# EAGLE board SparkFun_MicroMod_Input_and_Display_Carrier-Panel (EAGLE 9.6.2), part 1 of 2
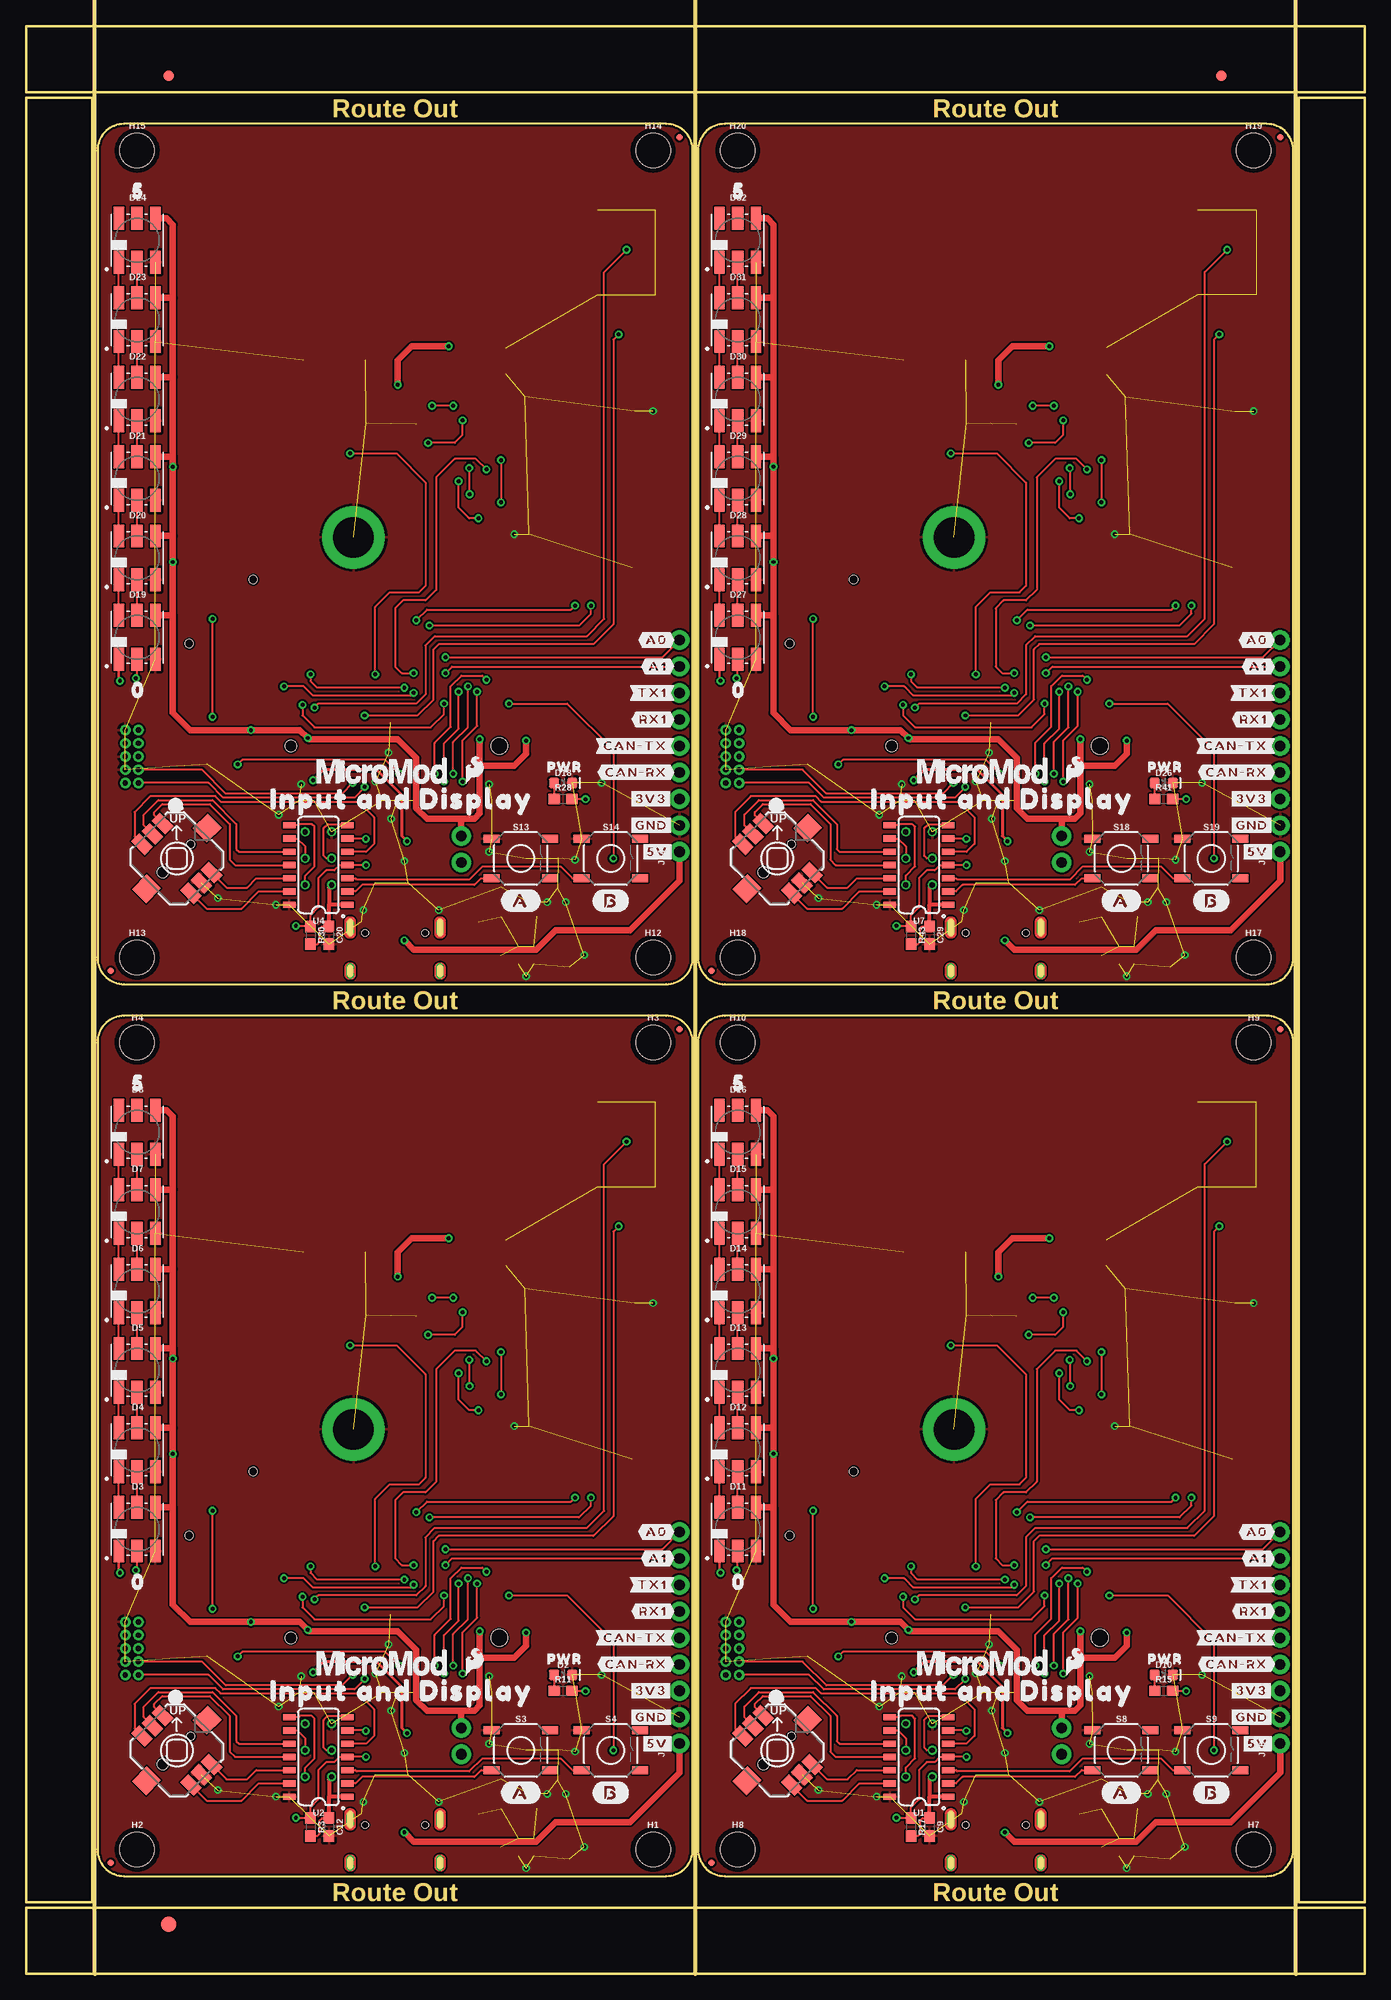
[diagram p0: board, top side]
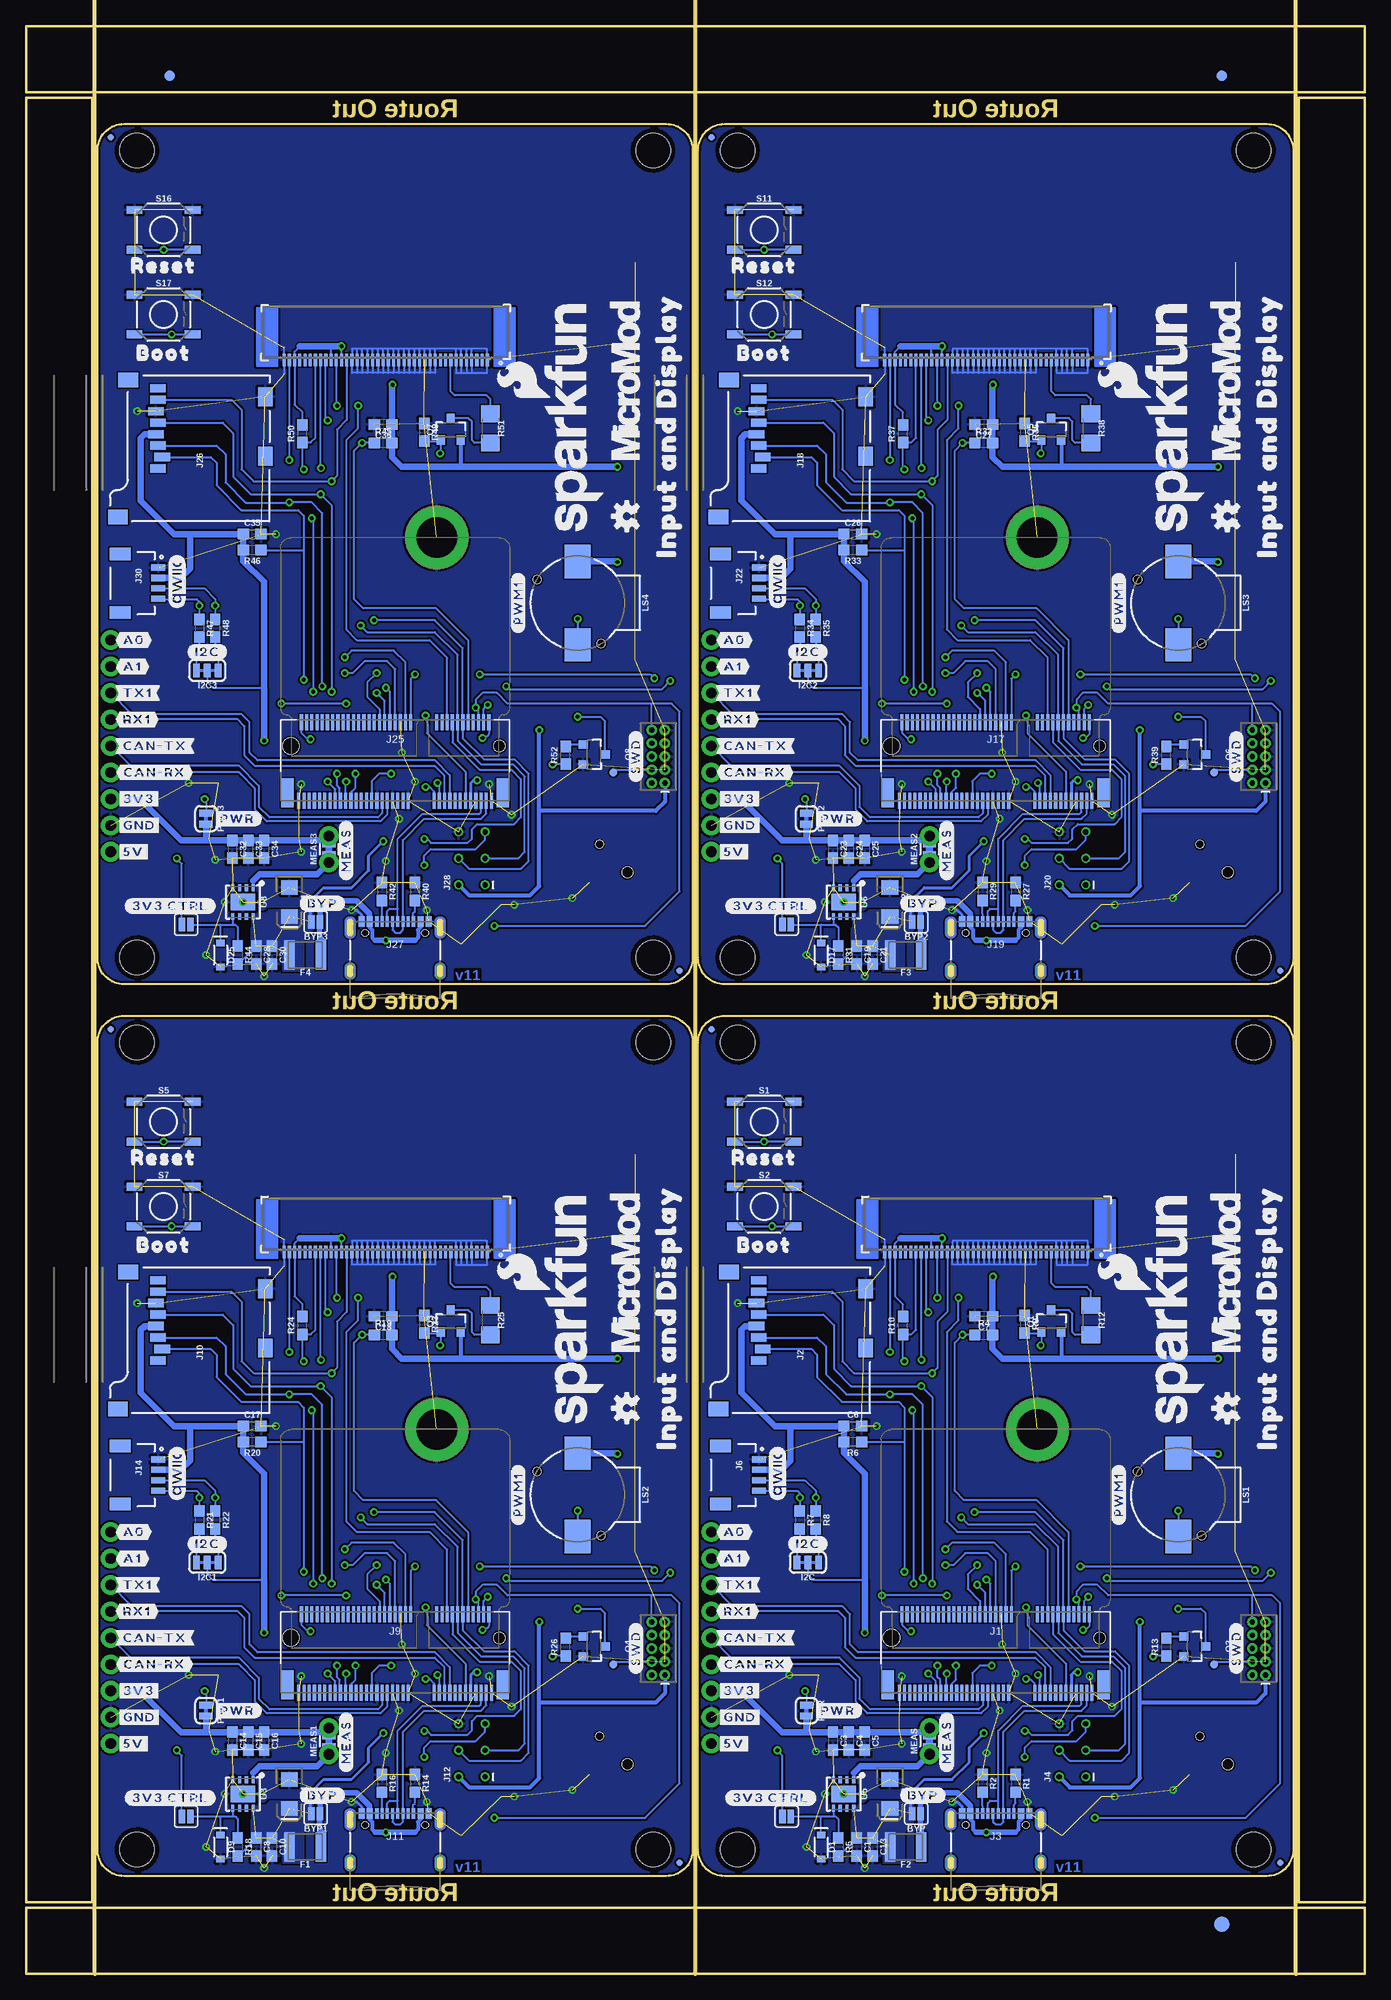
[diagram p1: board, bottom side, seen from below]

Size 128.52 x 186.94 mm. Coordinates in mm from the lower left corner, seen from the top.
Outline: 64.01,11.94 64.01,89.41 arc90 61.47,91.95 9.4,91.95 arc90 6.86,89.41 6.86,11.94 arc90 9.4,9.4 61.47,9.4 arc90 64.01,11.94
Outline: 121.67,11.94 121.67,89.41 arc90 119.13,91.95 67.06,91.95 arc90 64.52,89.41 64.52,11.94 arc90 67.06,9.4 119.13,9.4 arc90 121.67,11.94
Outline: 64.01,97.54 64.01,175.01 arc90 61.47,177.55 9.4,177.55 arc90 6.86,175.01 6.86,97.54 arc90 9.4,95 61.47,95 arc90 64.01,97.54
Outline: 121.67,97.54 121.67,175.01 arc90 119.13,177.55 67.06,177.55 arc90 64.52,175.01 64.52,97.54 arc90 67.06,95 119.13,95 arc90 121.67,97.54
Outline: 0,6.35 128.52,6.35 128.52,0 0,0 0,6.35
Outline: 122.17,180.09 128.52,180.09 128.52,6.86 122.17,6.86 122.17,180.09
Outline: 0,186.94 128.52,186.94 128.52,180.59 0,180.59 0,186.94
Outline: 0,180.09 6.35,180.09 6.35,6.86 0,6.86 0,180.09
Copper layers (1*16): Top 0.035mm / dielectric 1.5mm / Bottom 0.035mm
Design rules "SparkFun_MicroMod_Input_and_Display_Carrier": minimum track width 7mil, minimum drill 15mil, track to track 7mil, track to pad 7mil, pad to pad 7mil, via to via 7mil, smd to smd 7mil, copper to edge 7mil, drill to drill 7mil, minimum pad ring 7mil, minimum via ring 7mil, stop-mask expansion 4mil, vias tented up to drill 25mil, thermal gap 10mil
Milling: 3 lines

## Footprints (pad centres in the part's own frame; a part is rotated, then mirrored left to right if it is on the bottom)
SMT-JUMPER_2_NO_SILK = smd 0.635 x 1.27: 1 -0.406,0; 2 0.406,0
0603 = smd 1.1 x 1: 1 -0.85,0; 2 0.85,0
EIA3216 = smd 1.4 x 1.6: + 1.4,0; - -1.4,0
SOD-323 = smd 0.63 x 0.83: A 1.15,0; C -1.15,0
LED-0603 = smd 1 x 1: A -0.877,0; C 0.877,0
APA102-5050 = smd 1 x 2.2: P1 -1.75,-2.1; P3 1.75,-2.1; P4 1.75,2.1; P6 -1.75,2.1 | smd 1.1 x 2.2: P2 0,-2.1; P5 0,2.1
FIDUCIAL-1X2 = smd 1 x 1: 1 0,0
FIDUCIAL-1.5X3 = smd 1.5 x 1.5: 1 0,0
1210 = smd 1 x 2.8: 1 -1.5,0; 2 1.5,0
FIDUCIAL-MICRO = smd 0.635 x 0.635: 1 0,0
STAND-OFF = hole 3.302: 0,0
STAND-OFF-REFLOW-M2.5 = drill 3.9 pad 6: 1 0,0
SMT-JUMPER_3_2-NC_TRACE_SILK = smd 0.66 x 1.27: 1 -1.041,0; 2 0,0; 3 1.041,0
M.2-CONNECTOR-E = smd 0.3 x 1.55: 1 9.25,-5.275; 2 9,2.275; 3 8.75,-5.275; 4 8.5,2.275; 5 8.25,-5.275; 6 8,2.275; 7 7.75,-5.275; 8 7.5,2.275; 9 7.25,-5.275; 10 7,2.275; 11 6.75,-5.275; 12 6.5,2.275; 13 6.25,-5.275; 14 6,2.275; 15 5.75,-5.275; 16 5.5,2.275; 17 5.25,-5.275; 18 5,2.275; 19 4.75,-5.275; 20 4.5,2.275; 21 4.25,-5.275; 22 4,2.275; 23 3.75,-5.275; 32 1.5,2.275; 33 1.25,-5.275; 34 1,2.275; 35 0.75,-5.275; 36 0.5,2.275; 37 0.25,-5.275; 38 0,2.275; 39 -0.25,-5.275; 40 -0.5,2.275; 41 -0.75,-5.275; 42 -1,2.275; 43 -1.25,-5.275; 44 -1.5,2.275; 45 -1.75,-5.275; 46 -2,2.275; 47 -2.25,-5.275; 48 -2.5,2.275; 49 -2.75,-5.275; 50 -3,2.275; 51 -3.25,-5.275; 52 -3.5,2.275; 53 -3.75,-5.275; 54 -4,2.275; 55 -4.25,-5.275; 56 -4.5,2.275; 57 -4.75,-5.275; 58 -5,2.275; 59 -5.25,-5.275; 60 -5.5,2.275; 61 -5.75,-5.275; 62 -6,2.275; 63 -6.25,-5.275; 64 -6.5,2.275; 65 -6.75,-5.275; 66 -7,2.275; 67 -7.25,-5.275; 68 -7.5,2.275; 69 -7.75,-5.275; 70 -8,2.275; 71 -8.25,-5.275; 72 -8.5,2.275; 73 -8.75,-5.275; 74 -9,2.275; 75 -9.25,-5.275 | smd 1.2 x 2.75: A1 10.35,-4.5; A2 -10.35,-4.5 | hole 1.1: 10,0 | hole 1.6: -10,0
MICRO-SD-SOCKET = smd 1.8 x 1.4: CD1 -2.05,0.4; CD2 -7.75,0.4 | smd 0.8 x 1.5: CS -7.84,10.3; DI -6.74,10.7; DO -2.34,10.7; GND -3.44,10.9; RSV1 -8.94,10.7; RSV2 -1.24,10.7; SCLK -4.54,10.7; VCC -5.64,10.9 | smd 1.4 x 1.9: GND1 -13.6,14.55; GND3 -0.45,13.55
USB-C-16P-2LAYER-PADS = smd 0.3 x 1: A5 -1.25,-0.34; A6 -0.25,-0.34; A7 0.25,-0.34; A8 1.25,-0.34; B5 1.75,-0.34; B6 0.75,-0.34; B7 -0.75,-0.34; B8 -1.75,-0.34 | smd 0.6 x 1: GND -3.225,-0.34; GND2 3.225,-0.34; VBUS1 -2.45,-0.34; VBUS2 2.45,-0.34 | drill 0.4 pad 0.6 long: SHLD1 -4.318,-0.915; SHLD2 4.318,-0.915; SHLD3 -4.318,-5.095; SHLD4 4.318,-5.095 | hole 0.65: -2.89,-1.445; 2.89,-1.445
2X3_TEST_POINTS = drill 0.508: 1 -2.54,-1.27; 2 -2.54,1.27; 3 0,-1.27; 4 0,1.27; 5 2.54,-1.27; 6 2.54,1.27
FPC05040-17204 = smd 0.3 x 1.2: 1 -9.75,0.6; 2 -9.25,0.6; 3 -8.75,0.6; 4 -8.25,0.6; 5 -7.75,0.6; 6 -7.25,0.6; 7 -6.75,0.6; 8 -6.25,0.6; 9 -5.75,0.6; 10 -5.25,0.6; 11 -4.75,0.6; 12 -4.25,0.6; 13 -3.75,0.6; 14 -3.25,0.6; 15 -2.75,0.6; 16 -2.25,0.6; 17 -1.75,0.6; 18 -1.25,0.6; 19 -0.75,0.6; 20 -0.25,0.6; 21 0.25,0.6; 22 0.75,0.6; 23 1.25,0.6; 24 1.75,0.6; 25 2.25,0.6; 26 2.75,0.6; 27 3.25,0.6; 28 3.75,0.6; 29 4.25,0.6; 30 4.75,0.6; 31 5.25,0.6; 32 5.75,0.6; 33 6.25,0.6; 34 6.75,0.6; 35 7.25,0.6; 36 7.75,0.6; 37 8.25,0.6; 38 8.75,0.6; 39 9.25,0.6; 40 9.75,0.6
JST04_1MM_RA = smd 0.6 x 1.35: 1 -1.5,0; 2 -0.5,0; 3 0.5,0; 4 1.5,0 | smd 1.2 x 2: NC1 2.8,-3.675; NC2 -2.8,-3.675
2X5-PTH-1.27MM-NO_SILK = drill 0.508 pad 1: 1 -2.54,-0.635; 2 -2.54,0.635; 3 -1.27,-0.635; 4 -1.27,0.635; 5 0,-0.635; 6 0,0.635; 7 1.27,-0.635; 8 1.27,0.635; 9 2.54,-0.635; 10 2.54,0.635
1X09_NO_SILK = drill 1.016 pad 1.88: 1 0,0; 2 2.54,0; 3 5.08,0; 4 7.62,0; 5 10.16,0; 6 12.7,0; 7 15.24,0; 8 17.78,0; 9 20.32,0
BUZZER-CCV = smd 3.2 x 2.5: + 4,0; - -4,0 | hole 0.8: -3.9,-2.25; 2.25,3.9
COMBO-JUMPER_2_NC_TRACE = smd 0.635 x 1.27: 1 -0.508,0; 2 0.508,0 | drill 1.016 pad 1.88: 3 -1.27,0; 4 1.27,0
SMT-JUMPER_2_NC_TRACE_SILK = smd 0.66 x 1.27: 1 -0.521,0; 2 0.521,0
SOT23-3 = smd 0.8 x 0.9: 1 -0.95,-1; 2 0.95,-1; 3 0,1.1
1206 = smd 1.6 x 1.8: 1 -1.4,0; 2 1.4,0
TACTILE_SWITCH_SMD_5.2MM = smd 1.524 x 0.762: 1 -2.794,1.905; 2 2.794,1.905; 3 -2.794,-1.905; 4 2.794,-1.905
JOYSTICK_MINI = smd 1.85 x 1.1: A -3.325,1.4; B 3.325,1.4; C -3.325,-1.4; CTR -3.325,0; D 3.325,-1.4; GND 3.325,0 | smd 1.9 x 2: NC 0,4.13; NC@0 0,-4.13 | hole 0.75: 0,1.9 | hole 1.05: 0,-1.9
PAD.03X.03 = smd 0.762 x 0.762: P$1 0,0
SO14 = smd 0.6 x 1.2: 1 -3.81,-2.8; 2 -2.54,-2.8; 3 -1.27,-2.8; 4 0,-2.8; 5 1.27,-2.8; 6 2.54,-2.8; 7 3.81,-2.8; 8 3.81,2.8; 9 2.54,2.8; 10 1.27,2.8; 11 0,2.8; 12 -1.27,2.8; 13 -2.54,2.8; 14 -3.81,2.8
UDFN-8 = smd 0.3 x 0.65: 1 -0.975,-1.375; 2 -0.325,-1.375; 3 0.325,-1.375; 4 0.975,-1.375; 5 0.975,1.375; 6 0.325,1.375; 7 -0.325,1.375; 8 -0.975,1.375 | smd 2.35 x 1.6: EP 0,0

## Placement (x,y rotation side)
3V3_EN  [SMT-JUMPER_2_NO_SILK]  55.5,15.11 0 bottom
3V3_EN1  [SMT-JUMPER_2_NO_SILK]  113.16,15.11 0 bottom
3V3_EN2  [SMT-JUMPER_2_NO_SILK]  55.5,100.71 0 bottom
3V3_EN3  [SMT-JUMPER_2_NO_SILK]  113.16,100.71 0 bottom
BYP  JUMPER-SMT_2_NO_SILK  [SMT-JUMPER_2_NO_SILK]  43.05,15.37 180 bottom
BYP1  JUMPER-SMT_2_NO_SILK  [SMT-JUMPER_2_NO_SILK]  100.71,15.37 180 bottom
BYP2  JUMPER-SMT_2_NO_SILK  [SMT-JUMPER_2_NO_SILK]  43.05,100.96 180 bottom
BYP3  JUMPER-SMT_2_NO_SILK  [SMT-JUMPER_2_NO_SILK]  100.71,100.96 180 bottom
C1  0.1uF  [0603]  48.77,12.19 270 bottom
C2  10uF  [EIA3216]  45.59,17.27 270 bottom
C3  1.0uF  [0603]  51.05,22.35 270 bottom
C4  0.1uF  [0603]  49.53,22.35 270 bottom
C5  0.22uF  [0603]  48.01,22.35 270 bottom
C6  0.1uF  [0603]  49.15,52.58 0 bottom
C7  0.1uF  [0603]  36.58,63.12 180 bottom
C8  0.1uF  [0603]  106.43,12.19 270 bottom
C9  0.1uF  [0603]  86.74,14.1 270 top
C10  0.22uF  [0603]  104.9,12.19 270 bottom
C11  10uF  [EIA3216]  103.25,17.27 270 bottom
C12  0.1uF  [0603]  29.08,14.1 270 top
C13  0.22uF  [0603]  47.24,12.19 270 bottom
C14  1.0uF  [0603]  108.71,22.35 270 bottom
C15  0.1uF  [0603]  107.19,22.35 270 bottom
C16  0.22uF  [0603]  105.66,22.35 270 bottom
C17  0.1uF  [0603]  106.81,52.58 0 bottom
C18  0.1uF  [0603]  94.23,63.12 180 bottom
C19  0.1uF  [0603]  48.77,97.79 270 bottom
C20  0.1uF  [0603]  29.08,99.69 270 top
C21  0.22uF  [0603]  47.24,97.79 270 bottom
C22  10uF  [EIA3216]  45.59,102.87 270 bottom
C23  1.0uF  [0603]  51.05,107.95 270 bottom
C24  0.1uF  [0603]  49.53,107.95 270 bottom
C25  0.22uF  [0603]  48.01,107.95 270 bottom
C26  0.1uF  [0603]  49.15,138.18 0 bottom
C27  0.1uF  [0603]  36.58,148.72 180 bottom
C28  0.1uF  [0603]  106.43,97.79 270 bottom
C29  0.1uF  [0603]  86.74,99.69 270 top
C30  0.22uF  [0603]  104.9,97.79 270 bottom
C31  10uF  [EIA3216]  103.25,102.87 270 bottom
C32  1.0uF  [0603]  108.71,107.95 270 bottom
C33  0.1uF  [0603]  107.19,107.95 270 bottom
C34  0.22uF  [0603]  105.66,107.95 270 bottom
C35  0.1uF  [0603]  106.81,138.18 0 bottom
C36  0.1uF  [0603]  94.23,148.72 180 bottom
D1  3.3V  [SOD-323]  52.2,12.19 270 bottom
D2  RED  [LED-0603]  51.56,28.7 0 top
D3  APA102-5050  [APA102-5050]  10.67,42.69 0 top
D4  APA102-5050  [APA102-5050]  10.67,50.31 0 top
D5  APA102-5050  [APA102-5050]  10.67,57.93 0 top
D6  APA102-5050  [APA102-5050]  10.67,65.55 0 top
D7  APA102-5050  [APA102-5050]  10.67,73.17 0 top
D8  APA102-5050  [APA102-5050]  10.67,80.79 0 top
D9  3.3V  [SOD-323]  109.86,12.19 270 bottom
D10  RED  [LED-0603]  109.22,28.7 0 top
D11  APA102-5050  [APA102-5050]  68.33,42.69 0 top
D12  APA102-5050  [APA102-5050]  68.33,50.31 0 top
D13  APA102-5050  [APA102-5050]  68.33,57.93 0 top
D14  APA102-5050  [APA102-5050]  68.33,65.55 0 top
D15  APA102-5050  [APA102-5050]  68.33,73.17 0 top
D16  APA102-5050  [APA102-5050]  68.33,80.79 0 top
D17  3.3V  [SOD-323]  52.2,97.79 270 bottom
D18  RED  [LED-0603]  51.56,114.3 0 top
D19  APA102-5050  [APA102-5050]  10.67,128.29 0 top
D20  APA102-5050  [APA102-5050]  10.67,135.91 0 top
D21  APA102-5050  [APA102-5050]  10.67,143.53 0 top
D22  APA102-5050  [APA102-5050]  10.67,151.15 0 top
D23  APA102-5050  [APA102-5050]  10.67,158.77 0 top
D24  APA102-5050  [APA102-5050]  10.67,166.39 0 top
D25  3.3V  [SOD-323]  109.86,97.79 270 bottom
D26  RED  [LED-0603]  109.22,114.3 0 top
D27  APA102-5050  [APA102-5050]  68.33,128.29 0 top
D28  APA102-5050  [APA102-5050]  68.33,135.91 0 top
D29  APA102-5050  [APA102-5050]  68.33,143.53 0 top
D30  APA102-5050  [APA102-5050]  68.33,151.15 0 top
D31  APA102-5050  [APA102-5050]  68.33,158.77 0 top
D32  APA102-5050  [APA102-5050]  68.33,166.39 0 top
E$1  [FIDUCIAL-1X2]  13.72,182.18 0 top
E$2  [FIDUCIAL-1X2]  13.72,182.18 0 bottom
E$3  [FIDUCIAL-1X2]  114.74,182.18 0 top
E$4  [FIDUCIAL-1X2]  114.74,182.18 0 bottom
E$5  [FIDUCIAL-1.5X3]  13.72,4.76 0 top
E$6  [FIDUCIAL-1.5X3]  13.72,4.76 0 bottom
F1  6V/2A  [1210]  101.73,12.19 180 bottom
F2  6V/2A  [1210]  44.07,12.19 180 bottom
F3  6V/2A  [1210]  44.07,97.79 180 bottom
F4  6V/2A  [1210]  101.73,97.79 180 bottom
FD1  FIDUCIALUFIDUCIAL  [FIDUCIAL-MICRO]  8.13,10.67 0 bottom
FD2  FIDUCIALUFIDUCIAL  [FIDUCIAL-MICRO]  8.13,10.67 0 top
FD3  FIDUCIALUFIDUCIAL  [FIDUCIAL-MICRO]  62.74,90.68 0 top
FD4  FIDUCIALUFIDUCIAL  [FIDUCIAL-MICRO]  62.74,90.68 0 bottom
FD5  FIDUCIALUFIDUCIAL  [FIDUCIAL-MICRO]  65.79,10.67 0 bottom
FD6  FIDUCIALUFIDUCIAL  [FIDUCIAL-MICRO]  65.79,10.67 0 top
FD7  FIDUCIALUFIDUCIAL  [FIDUCIAL-MICRO]  120.4,90.68 0 top
FD8  FIDUCIALUFIDUCIAL  [FIDUCIAL-MICRO]  120.4,90.68 0 bottom
FD9  FIDUCIALUFIDUCIAL  [FIDUCIAL-MICRO]  8.13,96.27 0 bottom
FD10  FIDUCIALUFIDUCIAL  [FIDUCIAL-MICRO]  8.13,96.27 0 top
FD11  FIDUCIALUFIDUCIAL  [FIDUCIAL-MICRO]  62.74,176.28 0 top
FD12  FIDUCIALUFIDUCIAL  [FIDUCIAL-MICRO]  62.74,176.28 0 bottom
FD13  FIDUCIALUFIDUCIAL  [FIDUCIAL-MICRO]  65.79,96.27 0 bottom
FD14  FIDUCIALUFIDUCIAL  [FIDUCIAL-MICRO]  65.79,96.27 0 top
FD15  FIDUCIALUFIDUCIAL  [FIDUCIAL-MICRO]  120.4,176.28 0 top
FD16  FIDUCIALUFIDUCIAL  [FIDUCIAL-MICRO]  120.4,176.28 0 bottom
FRAME1  FRAME-LETTER  [CREATIVE_COMMONS]  11.94,-14.73 0 top  (outside the outline)
FRAME2  FRAME-LETTERNO_PACKAGE  [DUMMY]  -8.38,-16 0 top  (outside the outline)
FRAME3  FRAME-LETTER  [CREATIVE_COMMONS]  69.6,-14.73 0 top  (outside the outline)
FRAME4  FRAME-LETTERNO_PACKAGE  [DUMMY]  49.28,-16 0 top  (outside the outline)
FRAME5  FRAME-LETTER  [CREATIVE_COMMONS]  11.94,70.87 0 top
FRAME6  FRAME-LETTERNO_PACKAGE  [DUMMY]  -8.38,69.6 0 top  (outside the outline)
FRAME7  FRAME-LETTER  [CREATIVE_COMMONS]  69.6,70.87 0 top
FRAME8  FRAME-LETTERNO_PACKAGE  [DUMMY]  49.28,69.6 0 top
H1  STAND-OFF  [STAND-OFF]  60.2,11.94 0 top
H2  STAND-OFF  [STAND-OFF]  10.67,11.94 0 top
H3  STAND-OFF  [STAND-OFF]  60.2,89.41 0 top
H4  STAND-OFF  [STAND-OFF]  10.67,89.41 0 top
H5  STAND-OFF  [STAND-OFF-REFLOW-M2.5]  31.44,52.26 90 bottom
H6  STAND-OFF  [STAND-OFF-REFLOW-M2.5]  89.1,52.26 90 bottom
H7  STAND-OFF  [STAND-OFF]  117.86,11.94 0 top
H8  STAND-OFF  [STAND-OFF]  68.33,11.94 0 top
H9  STAND-OFF  [STAND-OFF]  117.86,89.41 0 top
H10  STAND-OFF  [STAND-OFF]  68.33,89.41 0 top
H11  STAND-OFF  [STAND-OFF-REFLOW-M2.5]  31.44,137.86 90 bottom
H12  STAND-OFF  [STAND-OFF]  60.2,97.54 0 top
H13  STAND-OFF  [STAND-OFF]  10.67,97.54 0 top
H14  STAND-OFF  [STAND-OFF]  60.2,175.01 0 top
H15  STAND-OFF  [STAND-OFF]  10.67,175.01 0 top
H16  STAND-OFF  [STAND-OFF-REFLOW-M2.5]  89.1,137.86 90 bottom
H17  STAND-OFF  [STAND-OFF]  117.86,97.54 0 top
H18  STAND-OFF  [STAND-OFF]  68.33,97.54 0 top
H19  STAND-OFF  [STAND-OFF]  117.86,175.01 0 top
H20  STAND-OFF  [STAND-OFF]  68.33,175.01 0 top
I2C  [SMT-JUMPER_3_2-NC_TRACE_SILK]  53.47,39.5 180 bottom
I2C1  [SMT-JUMPER_3_2-NC_TRACE_SILK]  111.12,39.5 180 bottom
I2C2  [SMT-JUMPER_3_2-NC_TRACE_SILK]  53.47,125.09 180 bottom
I2C3  [SMT-JUMPER_3_2-NC_TRACE_SILK]  111.12,125.09 180 bottom
J1  MICROMOD-2222-C  [M.2-CONNECTOR-E]  35.43,32.26 0 bottom
J2  MICRO-SD  [MICRO-SD-SOCKET]  47.5,67.82 90 bottom
J3  USB-C_Prog  [USB-C-16P-2LAYER-PADS]  35.43,15.75 0 bottom
J4  AVR_SPI_PROG_3X2TESTPOINTS  [2X3_TEST_POINTS]  28.07,21.46 90 bottom
J5  2.4" TFT  [FPC05040-17204]  36.33,69.9 180 bottom
J6  QWIIC_RA  [JST04_1MM_RA]  58.17,47.88 270 bottom
J7  CORTEX_JTAG_DEBUG  [2X5-PTH-1.27MM-NO_SILK]  10.16,31.24 90 bottom
J8  [1X09_NO_SILK]  62.74,22.1 90 top
J9  MICROMOD-2222-C  [M.2-CONNECTOR-E]  93.09,32.26 0 bottom
J10  MICRO-SD  [MICRO-SD-SOCKET]  105.16,67.82 90 bottom
J11  USB-C_Prog  [USB-C-16P-2LAYER-PADS]  93.09,15.75 0 bottom
J12  AVR_SPI_PROG_3X2TESTPOINTS  [2X3_TEST_POINTS]  85.73,21.46 90 bottom
J13  2.4" TFT  [FPC05040-17204]  93.99,69.9 180 bottom
J14  QWIIC_RA  [JST04_1MM_RA]  115.82,47.88 270 bottom
J15  CORTEX_JTAG_DEBUG  [2X5-PTH-1.27MM-NO_SILK]  67.82,31.24 90 bottom
J16  [1X09_NO_SILK]  120.4,22.1 90 top
J17  MICROMOD-2222-C  [M.2-CONNECTOR-E]  35.43,117.86 0 bottom
J18  MICRO-SD  [MICRO-SD-SOCKET]  47.5,153.42 90 bottom
J19  USB-C_Prog  [USB-C-16P-2LAYER-PADS]  35.43,101.35 0 bottom
J20  AVR_SPI_PROG_3X2TESTPOINTS  [2X3_TEST_POINTS]  28.07,107.06 90 bottom
J21  2.4" TFT  [FPC05040-17204]  36.33,155.5 180 bottom
J22  QWIIC_RA  [JST04_1MM_RA]  58.17,133.48 270 bottom
J23  CORTEX_JTAG_DEBUG  [2X5-PTH-1.27MM-NO_SILK]  10.16,116.84 90 bottom
J24  [1X09_NO_SILK]  62.74,107.7 90 top
J25  MICROMOD-2222-C  [M.2-CONNECTOR-E]  93.09,117.86 0 bottom
J26  MICRO-SD  [MICRO-SD-SOCKET]  105.16,153.42 90 bottom
J27  USB-C_Prog  [USB-C-16P-2LAYER-PADS]  93.09,101.35 0 bottom
J28  AVR_SPI_PROG_3X2TESTPOINTS  [2X3_TEST_POINTS]  85.73,107.06 90 bottom
J29  2.4" TFT  [FPC05040-17204]  93.99,155.5 180 bottom
J30  QWIIC_RA  [JST04_1MM_RA]  115.82,133.48 270 bottom
J31  CORTEX_JTAG_DEBUG  [2X5-PTH-1.27MM-NO_SILK]  67.82,116.84 90 bottom
J32  [1X09_NO_SILK]  120.4,107.7 90 top
LOGO1  SFE_LOGO_NAME_FLAME.2_INCH  [SFE_LOGO_NAME_FLAME_.2]  18.27,63.83 90 bottom
LOGO2  QWIIC_LOGO_5MM  [QWIIC_5MM]  56.39,48.01 90 bottom
LOGO3  OSHW-LOGOS  [OSHW-LOGO-S]  13.19,54.3 90 bottom
LOGO4  SFE_LOGO_NAME_FLAME.2_INCH  [SFE_LOGO_NAME_FLAME_.2]  75.93,63.83 90 bottom
LOGO5  QWIIC_LOGO_5MM  [QWIIC_5MM]  114.05,48.01 90 bottom
LOGO6  OSHW-LOGOS  [OSHW-LOGO-S]  70.85,54.3 90 bottom
LOGO7  SFE_LOGO_NAME_FLAME.2_INCH  [SFE_LOGO_NAME_FLAME_.2]  18.27,149.42 90 bottom
LOGO8  QWIIC_LOGO_5MM  [QWIIC_5MM]  56.39,133.6 90 bottom
LOGO9  OSHW-LOGOS  [OSHW-LOGO-S]  13.19,139.9 90 bottom
LOGO10  SFE_LOGO_NAME_FLAME.2_INCH  [SFE_LOGO_NAME_FLAME_.2]  75.93,149.42 90 bottom
LOGO11  QWIIC_LOGO_5MM  [QWIIC_5MM]  114.05,133.6 90 bottom
LOGO12  OSHW-LOGOS  [OSHW-LOGO-S]  70.85,139.9 90 bottom
LS1  Buzzer  [BUZZER-CCV]  17.91,45.97 90 bottom
LS2  Buzzer  [BUZZER-CCV]  75.56,45.97 90 bottom
LS3  Buzzer  [BUZZER-CCV]  17.91,131.57 90 bottom
LS4  Buzzer  [BUZZER-CCV]  75.56,131.57 90 bottom
MEAS  [COMBO-JUMPER_2_NC_TRACE]  41.78,22.35 90 bottom
MEAS1  [COMBO-JUMPER_2_NC_TRACE]  99.44,22.35 90 bottom
MEAS2  [COMBO-JUMPER_2_NC_TRACE]  41.78,107.95 90 bottom
MEAS3  [COMBO-JUMPER_2_NC_TRACE]  99.44,107.95 90 bottom
PWR  [SMT-JUMPER_2_NC_TRACE_SILK]  53.59,25.27 270 bottom
PWR1  [SMT-JUMPER_2_NC_TRACE_SILK]  111.25,25.27 270 bottom
PWR2  [SMT-JUMPER_2_NC_TRACE_SILK]  53.59,110.87 270 bottom
PWR3  [SMT-JUMPER_2_NC_TRACE_SILK]  111.25,110.87 270 bottom
Q1  1.1A/600mΩ  [SOT23-3]  30.1,62.61 0 bottom
Q2  600mA/40V  [SOT23-3]  16.37,31.43 270 bottom
Q3  1.1A/600mΩ  [SOT23-3]  87.76,62.61 0 bottom
Q4  600mA/40V  [SOT23-3]  74.03,31.43 270 bottom
Q5  1.1A/600mΩ  [SOT23-3]  30.1,148.21 0 bottom
Q6  600mA/40V  [SOT23-3]  16.37,117.03 270 bottom
Q7  1.1A/600mΩ  [SOT23-3]  87.76,148.21 0 bottom
Q8  600mA/40V  [SOT23-3]  74.03,117.03 270 bottom
R1  5.1k  [0603]  33.53,18.29 270 bottom
R2  5.1k  [0603]  36.7,18.29 270 bottom
R3  100k  [0603]  27.3,14.1 270 top
R4  100k  [0603]  36.58,61.34 0 bottom
R5  100k  [0603]  50.55,12.19 270 bottom
R6  100k  [0603]  49.15,51.05 180 bottom
R7  2.2k  [0603]  54.23,43.56 270 bottom
R8  2.2k  [0603]  52.7,43.56 270 bottom
R9  100k  [0603]  32.64,62.36 270 bottom
R10  100k  [0603]  44.32,62.23 90 bottom
R11  1k  [0603]  51.56,27.18 0 top
R12  10  [1206]  26.29,62.74 270 bottom
R13  1k  [0603]  19.05,31.37 90 bottom
R14  5.1k  [0603]  91.19,18.29 270 bottom
R15  1k  [0603]  109.22,27.18 0 top
R16  5.1k  [0603]  94.36,18.29 270 bottom
R17  100k  [0603]  84.96,14.1 270 top
R18  100k  [0603]  108.2,12.19 270 bottom
R19  100k  [0603]  94.23,61.34 0 bottom
R20  100k  [0603]  106.81,51.05 180 bottom
R21  2.2k  [0603]  111.89,43.56 270 bottom
R22  2.2k  [0603]  110.36,43.56 270 bottom
R23  100k  [0603]  90.3,62.36 270 bottom
R24  100k  [0603]  101.98,62.23 90 bottom
R25  10  [1206]  83.95,62.74 270 bottom
R26  1k  [0603]  76.71,31.37 90 bottom
R27  5.1k  [0603]  33.53,103.89 270 bottom
R28  1k  [0603]  51.56,112.78 0 top
R29  5.1k  [0603]  36.7,103.89 270 bottom
R30  100k  [0603]  27.3,99.69 270 top
R31  100k  [0603]  50.55,97.79 270 bottom
R32  100k  [0603]  36.58,146.94 0 bottom
R33  100k  [0603]  49.15,136.65 180 bottom
R34  2.2k  [0603]  54.23,129.16 270 bottom
R35  2.2k  [0603]  52.7,129.16 270 bottom
R36  100k  [0603]  32.64,147.95 270 bottom
R37  100k  [0603]  44.32,147.83 90 bottom
R38  10  [1206]  26.29,148.34 270 bottom
R39  1k  [0603]  19.05,116.97 90 bottom
R40  5.1k  [0603]  91.19,103.89 270 bottom
R41  1k  [0603]  109.22,112.78 0 top
R42  5.1k  [0603]  94.36,103.89 270 bottom
R43  100k  [0603]  84.96,99.69 270 top
R44  100k  [0603]  108.2,97.79 270 bottom
R45  100k  [0603]  94.23,146.94 0 bottom
R46  100k  [0603]  106.81,136.65 180 bottom
R47  2.2k  [0603]  111.89,129.16 270 bottom
R48  2.2k  [0603]  110.36,129.16 270 bottom
R49  100k  [0603]  90.3,147.95 270 bottom
R50  100k  [0603]  101.98,147.83 90 bottom
R51  10  [1206]  83.95,148.34 270 bottom
R52  1k  [0603]  76.71,116.97 90 bottom
S1  Reset  [TACTILE_SWITCH_SMD_5.2MM]  57.66,81.79 0 bottom
S2  BOOT  [TACTILE_SWITCH_SMD_5.2MM]  57.66,73.66 0 bottom
S3  MOMENTARY-SWITCH-SPST-SMD-5.2MM-TALL  [TACTILE_SWITCH_SMD_5.2MM]  47.5,21.46 0 top
S4  MOMENTARY-SWITCH-SPST-SMD-5.2MM-TALL  [TACTILE_SWITCH_SMD_5.2MM]  56.13,21.46 0 top
S5  Reset  [TACTILE_SWITCH_SMD_5.2MM]  115.32,81.79 0 bottom
S6  Joystick  [JOYSTICK_MINI]  14.48,21.46 315 top
S7  BOOT  [TACTILE_SWITCH_SMD_5.2MM]  115.32,73.66 0 bottom
S8  MOMENTARY-SWITCH-SPST-SMD-5.2MM-TALL  [TACTILE_SWITCH_SMD_5.2MM]  105.16,21.46 0 top
S9  MOMENTARY-SWITCH-SPST-SMD-5.2MM-TALL  [TACTILE_SWITCH_SMD_5.2MM]  113.79,21.46 0 top
S10  Joystick  [JOYSTICK_MINI]  72.14,21.46 315 top
S11  Reset  [TACTILE_SWITCH_SMD_5.2MM]  57.66,167.39 0 bottom
S12  BOOT  [TACTILE_SWITCH_SMD_5.2MM]  57.66,159.26 0 bottom
S13  MOMENTARY-SWITCH-SPST-SMD-5.2MM-TALL  [TACTILE_SWITCH_SMD_5.2MM]  47.5,107.06 0 top
S14  MOMENTARY-SWITCH-SPST-SMD-5.2MM-TALL  [TACTILE_SWITCH_SMD_5.2MM]  56.13,107.06 0 top
S15  Joystick  [JOYSTICK_MINI]  14.48,107.06 315 top
S16  Reset  [TACTILE_SWITCH_SMD_5.2MM]  115.32,167.39 0 bottom
S17  BOOT  [TACTILE_SWITCH_SMD_5.2MM]  115.32,159.26 0 bottom
S18  MOMENTARY-SWITCH-SPST-SMD-5.2MM-TALL  [TACTILE_SWITCH_SMD_5.2MM]  105.16,107.06 0 top
S19  MOMENTARY-SWITCH-SPST-SMD-5.2MM-TALL  [TACTILE_SWITCH_SMD_5.2MM]  113.79,107.06 0 top
S20  Joystick  [JOYSTICK_MINI]  72.14,107.06 315 top
TP1  [PAD.03X.03]  14.48,29.72 0 bottom
TP2  [PAD.03X.03]  72.14,29.72 0 bottom
TP3  [PAD.03X.03]  14.48,115.32 0 bottom
TP4  [PAD.03X.03]  72.14,115.32 0 bottom
U1  ATTINY84  [SO14]  85.73,20.83 90 top
U2  ATTINY84  [SO14]  28.07,20.83 90 top
U3  AP7361C-33FGE  [UDFN-8]  107.7,17.27 180 bottom
U4  ATTINY84  [SO14]  28.07,106.43 90 top
U5  AP7361C-33FGE  [UDFN-8]  50.04,17.27 180 bottom
U6  AP7361C-33FGE  [UDFN-8]  50.04,102.87 180 bottom
U7  ATTINY84  [SO14]  85.73,106.43 90 top
U8  AP7361C-33FGE  [UDFN-8]  107.7,102.87 180 bottom
U$1  [MICROMOD_LOGO_.5]  34.16,29.84 0 top
U$2  [INPUT_AND_DISPLAY0]  36.07,27.18 0 top
U$3  [SFE_LOGO_FLAME_.1]  43.05,29.97 0 top
U$4  [BOOT0]  57.66,69.98 0 bottom
U$5  [#A#0]  47.5,17.4 0 top
U$6  [#B#0]  56.13,17.4 0 top
U$7  [00]  10.79,37.61 0 top
U$8  [50]  10.79,85.49 0 top
U$9  [RESET0]  57.66,78.36 0 bottom
U$10  [MICROMOD_LOGO_.6]  13.32,67.31 90 bottom
U$11  [#MEAS#0]  40.13,22.23 90 bottom
U$12  [#I2C#0]  53.47,41.27 0 bottom
U$13  [PWR0]  51.69,30.23 0 top
U$14  [#BYP#0]  42.42,17.14 0 bottom
U$15  [#SWD#0]  12.32,31.24 90 bottom
U$16  [INPUT_AND_DISPLAY0]  36.07,27.18 0 top
U$17  [INPUT_AND_DISPLAY0]  9.4,63.01 90 bottom
U$18  [#5V#0]  62.23,22.1 0 bottom
U$19  [#PWR#0]  52.96,25.27 0 bottom
U$20  [#3V3_CTRL#0]  57.02,16.89 0 bottom
U$21  [#PWM1#0]  23.62,45.97 90 bottom
U$22  [#A0#0]  62.23,42.42 0 top
U$23  [#A0#0]  58.8,42.42 0 bottom
U$24  [#A1#0]  62.23,39.88 0 top
U$25  [#A1#0]  59.05,39.88 0 bottom
U$26  [#TX1#0]  62.23,37.34 0 top
U$27  [#TX1#0]  58.04,37.34 0 bottom
U$28  [#3V3#0]  62.23,27.18 0 bottom
U$29  [#GND#0]  62.23,24.64 0 bottom
U$30  [#GND#0]  57.78,24.64 0 top
U$31  [#3V3#0]  57.78,27.18 0 top
U$32  [#RX1#0]  62.23,34.8 0 top
U$33  [#RX1#0]  58.17,34.8 0 bottom
U$34  [#CAN#RX#0]  62.23,29.72 0 top
U$35  [#CAN#RX#0]  54.86,29.72 0 bottom
U$36  [#CAN#TX#0]  62.23,32.26 0 top
U$37  [#CAN#TX#0]  54.74,32.26 0 bottom
U$38  [#5V#0]  58.93,22.1 0 top
U$39  [MICROMOD_LOGO_.5]  91.82,29.84 0 top
U$40  [INPUT_AND_DISPLAY0]  93.73,27.18 0 top
U$41  [#A#0]  105.16,17.4 0 top
U$42  [#B#0]  113.79,17.4 0 top
U$43  [00]  68.45,37.61 0 top
U$44  [50]  68.45,85.49 0 top
U$45  [SFE_LOGO_FLAME_.1]  100.71,29.97 0 top
U$46  [BOOT0]  115.32,69.98 0 bottom
U$47  [RESET0]  115.32,78.36 0 bottom
U$48  [#MEAS#0]  97.79,22.23 90 bottom
U$49  [#I2C#0]  111.12,41.27 0 bottom
U$50  [PWR0]  109.35,30.23 0 top
U$51  [MICROMOD_LOGO_.6]  70.98,67.31 90 bottom
U$52  [#BYP#0]  100.08,17.14 0 bottom
U$53  [#SWD#0]  69.98,31.24 90 bottom
U$54  [INPUT_AND_DISPLAY0]  93.73,27.18 0 top
U$55  [INPUT_AND_DISPLAY0]  67.06,63.01 90 bottom
U$56  [#PWR#0]  110.62,25.27 0 bottom
U$57  [#3V3_CTRL#0]  114.68,16.89 0 bottom
U$58  [#PWM1#0]  81.28,45.97 90 bottom
U$59  [#3V3#0]  119.89,27.18 0 bottom
U$60  [#GND#0]  119.89,24.64 0 bottom
U$61  [#GND#0]  115.44,24.64 0 top
U$62  [#3V3#0]  115.44,27.18 0 top
U$63  [#A0#0]  119.89,42.42 0 top
U$64  [#A0#0]  116.46,42.42 0 bottom
U$65  [#A1#0]  119.89,39.88 0 top
U$66  [#A1#0]  116.71,39.88 0 bottom
U$67  [#TX1#0]  119.89,37.34 0 top
U$68  [#TX1#0]  115.7,37.34 0 bottom
U$69  [#RX1#0]  119.89,34.8 0 top
U$70  [#RX1#0]  115.82,34.8 0 bottom
U$71  [#CAN#RX#0]  119.89,29.72 0 top
U$72  [#CAN#RX#0]  112.52,29.72 0 bottom
U$73  [#CAN#TX#0]  119.89,32.26 0 top
U$74  [#CAN#TX#0]  112.4,32.26 0 bottom
U$75  [#5V#0]  119.89,22.1 0 bottom
U$76  [#5V#0]  116.59,22.1 0 top
U$77  [MICROMOD_LOGO_.5]  34.16,115.44 0 top
U$78  [INPUT_AND_DISPLAY0]  36.07,112.78 0 top
U$79  [#A#0]  47.5,103 0 top
U$80  [#B#0]  56.13,103 0 top
U$81  [00]  10.79,123.21 0 top
U$82  [50]  10.79,171.09 0 top
U$83  [SFE_LOGO_FLAME_.1]  43.05,115.57 0 top
U$84  [BOOT0]  57.66,155.57 0 bottom
U$85  [RESET0]  57.66,163.96 0 bottom
U$86  [#MEAS#0]  40.13,107.82 90 bottom
U$87  [#I2C#0]  53.47,126.87 0 bottom
U$88  [PWR0]  51.69,115.82 0 top
U$89  [MICROMOD_LOGO_.6]  13.32,152.9 90 bottom
U$90  [#BYP#0]  42.42,102.74 0 bottom
U$91  [#SWD#0]  12.32,116.84 90 bottom
U$92  [INPUT_AND_DISPLAY0]  36.07,112.78 0 top
U$93  [INPUT_AND_DISPLAY0]  9.4,148.61 90 bottom
U$94  [#PWR#0]  52.96,110.87 0 bottom
U$95  [#3V3_CTRL#0]  57.02,102.49 0 bottom
U$96  [#PWM1#0]  23.62,131.57 90 bottom
U$97  [#3V3#0]  62.23,112.78 0 bottom
U$98  [#GND#0]  62.23,110.24 0 bottom
U$99  [#GND#0]  57.78,110.24 0 top
U$100  [#3V3#0]  57.78,112.78 0 top
U$101  [#A0#0]  62.23,128.02 0 top
U$102  [#A0#0]  58.8,128.02 0 bottom
U$103  [#A1#0]  62.23,125.48 0 top
U$104  [#A1#0]  59.05,125.48 0 bottom
U$105  [#TX1#0]  62.23,122.94 0 top
U$106  [#TX1#0]  58.04,122.94 0 bottom
U$107  [#RX1#0]  62.23,120.4 0 top
U$108  [#RX1#0]  58.17,120.4 0 bottom
U$109  [#CAN#RX#0]  62.23,115.32 0 top
U$110  [#CAN#RX#0]  54.86,115.32 0 bottom
U$111  [#CAN#TX#0]  62.23,117.86 0 top
U$112  [#CAN#TX#0]  54.74,117.86 0 bottom
U$113  [#5V#0]  62.23,107.7 0 bottom
U$114  [#5V#0]  58.93,107.7 0 top
U$115  [MICROMOD_LOGO_.5]  91.82,115.44 0 top
U$116  [INPUT_AND_DISPLAY0]  93.73,112.78 0 top
U$117  [#A#0]  105.16,103 0 top
U$118  [#B#0]  113.79,103 0 top
U$119  [00]  68.45,123.21 0 top
U$120  [50]  68.45,171.09 0 top
U$121  [SFE_LOGO_FLAME_.1]  100.71,115.57 0 top
U$122  [BOOT0]  115.32,155.57 0 bottom
U$123  [RESET0]  115.32,163.96 0 bottom
U$124  [#MEAS#0]  97.79,107.82 90 bottom
U$125  [#I2C#0]  111.12,126.87 0 bottom
U$126  [PWR0]  109.35,115.82 0 top
U$127  [MICROMOD_LOGO_.6]  70.98,152.9 90 bottom
U$128  [#BYP#0]  100.08,102.74 0 bottom
U$129  [#SWD#0]  69.98,116.84 90 bottom
U$130  [INPUT_AND_DISPLAY0]  93.73,112.78 0 top
U$131  [INPUT_AND_DISPLAY0]  67.06,148.61 90 bottom
U$132  [#PWR#0]  110.62,110.87 0 bottom
U$133  [#3V3_CTRL#0]  114.68,102.49 0 bottom
U$134  [#PWM1#0]  81.28,131.57 90 bottom
U$135  [#3V3#0]  119.89,112.78 0 bottom
U$136  [#GND#0]  119.89,110.24 0 bottom
U$137  [#GND#0]  115.44,110.24 0 top
U$138  [#3V3#0]  115.44,112.78 0 top
U$139  [#A0#0]  119.89,128.02 0 top
U$140  [#A0#0]  116.46,128.02 0 bottom
U$141  [#A1#0]  119.89,125.48 0 top
U$142  [#A1#0]  116.71,125.48 0 bottom
U$143  [#TX1#0]  119.89,122.94 0 top
U$144  [#TX1#0]  115.7,122.94 0 bottom
U$145  [#RX1#0]  119.89,120.4 0 top
U$146  [#RX1#0]  115.82,120.4 0 bottom
U$147  [#CAN#RX#0]  119.89,115.32 0 top
U$148  [#CAN#RX#0]  112.52,115.32 0 bottom
U$149  [#CAN#TX#0]  119.89,117.86 0 top
U$150  [#CAN#TX#0]  112.4,117.86 0 bottom
U$151  [#5V#0]  119.89,107.7 0 bottom
U$152  [#5V#0]  116.59,107.7 0 top

## Library data of the parts
3V3_EN 3V3_EN1-3V3_EN3 BYP BYP1-BYP3 I2C I2C1-I2C3 MEAS MEAS1-MEAS3 PWR PWR1-PWR3 = SparkFun-Jumpers
C1 C4 C6-C9 C12 C15 C17-C20 C24 C26-C29 C33 C35 C36 = SparkFun-Capacitors; PROD_ID: CAP-00810
C2 C11 C22 C31 = SparkFun-Capacitors; PROD_ID: CAP-00811
C3 C14 C23 C32 = SparkFun-Capacitors; PROD_ID: CAP-00868
C5 C10 C13 C16 C21 C25 C30 C34 = SparkFun-Capacitors; PROD_ID: CAP-07822
D1 D9 D17 D25 = SparkFun-DiscreteSemi; PROD_ID: DIO-11284
D2 D10 D18 D26 = SparkFun-LED; PROD_ID: DIO-00819
D3-D8 D11-D16 D19-D24 D27-D32 = SparkFun-LED; PROD_ID: DIO-13739
E$1-E$4 FD1-FD16 FRAME1 FRAME3 FRAME5 FRAME7 LOGO1-LOGO12 U$3 U$45 U$83 U$121 = SparkFun-Aesthetics
E$5 E$6 = SparkFun-Retired
F1-F4 = SparkFun-Fuses; PROD_ID: RES-14313
FRAME2 FRAME4 FRAME6 FRAME8 = SparkFun-Aesthetics; DESIGNER: Nobody; VERSION: v01
H1-H4 H7-H10 H12-H15 H17-H20 = SparkFun-Hardware
H5 H6 H11 H16 = SparkFun-Hardware; PROD_ID: HW-14899
J1 J9 J17 J25 = SparkFun-MicroMod; PROD_ID: CONN-14877; SPICEPREFIX: X
J2 J10 J18 J26 = SparkFun-Connectors; PROD_ID: CONN-07820
J3 J11 J19 J27 = SparkFun-Connectors; PROD_ID: CONN-14122
J4 J7 J8 J12 J15 J16 J20 J23 J24 J28 J31 J32 TP1-TP4 = SparkFun-Connectors
J5 J13 J21 J29 = SparkFun-Displays; PROD_ID: LCD-14913; PROD_ID1: CONN-14082
J6 J14 J22 J30 = SparkFun-Connectors; PROD_ID: CONN-13694
LS1-LS4 = SparkFun-Electromechanical; PROD_ID: COMP-08568
Q1 Q3 Q5 Q7 = SparkFun-DiscreteSemi; PROD_ID: TRANS-08285
Q2 Q4 Q6 Q8 = SparkFun-DiscreteSemi; PROD_ID: TRANS-08049
R1 R2 R14 R16 R27 R29 R40 R42 = SparkFun-Resistors; PROD_ID: RES-12083
R3-R6 R9 R10 R17-R20 R23 R24 R30-R33 R36 R37 R43-R46 R49 R50 = SparkFun-Resistors; PROD_ID: RES-07828
R7 R8 R21 R22 R34 R35 R47 R48 = SparkFun-Resistors; PROD_ID: RES-08272
R11 R13 R15 R26 R28 R39 R41 R52 = SparkFun-Resistors; PROD_ID: RES-07856
R12 R25 R38 R51 = SparkFun-Resistors; PROD_ID: RES-08705
S1-S5 S7-S9 S11-S14 S16-S19 = SparkFun-Switches; PROD_ID: SWCH-14139
S6 S10 S15 S20 = SparkFun-Switches; PROD_ID: SWCH-09905; SF_SKU: COM-10063
U1 U2 U4 U7 = SparkFun-IC-Microcontroller; PROD_ID: IC-11285
U3 U5 U6 U8 = SparkFun-IC-Power; PROD_ID: VREG-14094
U$1 U$10 U$39 U$51 U$77 U$89 U$115 U$127 = SparkFun-MicroMod
U$2 U$4-U$9 U$11-U$38 U$40-U$44 U$46-U$50 U$52-U$76 U$78-U$82 U$84-U$88 U$90-U$114 U$116-U$120 U$122-U$126 U$128-U$152 = output

## Nets
3.3V: C3.1 C4.1 C5.1 C6.1 C7.1 C12.1 D3.P4 D4.P4 D5.P4 D6.P4 D7.P4 D8.P4 I2C.2 J1.2 J1.74 J2.VCC J4.2 J5.29 J5.31 J5.38 J6.2 J7.1 J8.3 LS1.+ MEAS.2 MEAS.4 PWR.2 Q1.2 R3.2 R4.2 R6.2 R10.2 U2.1
3.3V1: C9.1 C14.1 C15.1 C16.1 C17.1 C18.1 D11.P4 D12.P4 D13.P4 D14.P4 D15.P4 D16.P4 I2C1.2 J9.2 J9.74 J10.VCC J12.2 J13.29 J13.31 J13.38 J14.2 J15.1 J16.3 LS2.+ MEAS1.2 MEAS1.4 PWR1.2 Q3.2 R17.2 R19.2 R20.2 R24.2 U1.1
3.3V2: C20.1 C23.1 C24.1 C25.1 C26.1 C27.1 D19.P4 D20.P4 D21.P4 D22.P4 D23.P4 D24.P4 I2C2.2 J17.2 J17.74 J18.VCC J20.2 J21.29 J21.31 J21.38 J22.2 J23.1 J24.3 LS3.+ MEAS2.2 MEAS2.4 PWR2.2 Q5.2 R30.2 R32.2 R33.2 R37.2 U4.1
3.3V3: C29.1 C32.1 C33.1 C34.1 C35.1 C36.1 D27.P4 D28.P4 D29.P4 D30.P4 D31.P4 D32.P4 I2C3.2 J25.2 J25.74 J26.VCC J28.2 J29.29 J29.31 J29.38 J30.2 J31.1 J32.3 LS4.+ MEAS3.2 MEAS3.4 PWR3.2 Q7.2 R43.2 R45.2 R46.2 R50.2 U7.1
3.3V_EN: 3V3_EN.1 J1.4
3.3V_EN1: 3V3_EN1.1 J9.4
3.3V_EN2: 3V3_EN2.1 J17.4
3.3V_EN3: 3V3_EN3.1 J25.4
!BOOT: J1.11 S2.3 S2.4
!BOOT1: J9.11 S7.3 S7.4
!BOOT2: J17.11 S12.3 S12.4
!BOOT3: J25.11 S17.3 S17.4
!DISP_BL: J1.32 Q1.1 R9.2
!DISP_BL1: J9.32 Q3.1 R23.2
!DISP_BL2: J17.32 Q5.1 R36.2
!DISP_BL3: J25.32 Q7.1 R49.2
!DISP_CS: J1.10 J5.32 R4.1
!DISP_CS1: J9.10 J13.32 R19.1
!DISP_CS2: J17.10 J21.32 R32.1
!DISP_CS3: J25.10 J29.32 R45.1
!DISP_RST: J1.44 J5.34 R10.1
!DISP_RST1: J9.44 J13.34 R24.1
!DISP_RST2: J17.44 J21.34 R37.1
!DISP_RST3: J25.44 J29.34 R50.1
!INT: J1.16 U2.6
!INT1: J9.16 U1.6
!INT2: J17.16 U4.6
!INT3: J25.16 U7.6
!RESET: J1.6 J4.5 J7.10 R3.1 S1.3 S1.4 U2.4
!RESET1: J9.6 J12.5 J15.10 R17.1 S5.3 S5.4 U1.4
!RESET2: J17.6 J20.5 J23.10 R30.1 S11.3 S11.4 U4.4
!RESET3: J25.6 J28.5 J31.10 R43.1 S16.3 S16.4 U7.4
!SD_CS: J1.55 J2.CS R6.1
!SD_CS1: J9.55 J10.CS R20.1
!SD_CS2: J17.55 J18.CS R33.1
!SD_CS3: J25.55 J26.CS R46.1
A0: J1.34 J8.9
A1: J1.38 J8.8
A2: J9.34 J16.9
A3: J9.38 J16.8
A4: J17.34 J24.9
A5: J17.38 J24.8
A6: J25.34 J32.9
A7: J25.38 J32.8
BTN_A: S3.3 U2.2
BTN_A1: S8.3 U1.2
BTN_A2: S13.3 U4.2
BTN_A3: S18.3 U7.2
BTN_B: S4.3 U2.3
BTN_B1: S9.3 U1.3
BTN_B2: S14.3 U4.3
BTN_B3: S19.3 U7.3
BTN_CENTER: S6.CTR U2.10
BTN_CENTER1: S10.CTR U1.10
BTN_CENTER2: S15.CTR U4.10
BTN_CENTER3: S20.CTR U7.10
BTN_DOWN: S6.D U2.13
BTN_DOWN1: S10.D U1.13
BTN_DOWN2: S15.D U4.13
BTN_DOWN3: S20.D U7.13
BTN_LEFT: S6.C U2.5
BTN_LEFT1: S10.C U1.5
BTN_LEFT2: S15.C U4.5
BTN_LEFT3: S20.C U7.5
BTN_RIGHT: S6.B U2.12
BTN_RIGHT1: S10.B U1.12
BTN_RIGHT2: S15.B U4.12
BTN_RIGHT3: S20.B U7.12
BTN_UP: S6.A U2.11
BTN_UP1: S10.A U1.11
BTN_UP2: S15.A U4.11
BTN_UP3: S20.A U7.11
BUZZER: J1.47 R13.1
BUZZER1: J9.47 R26.1
BUZZER2: J17.47 R39.1
BUZZER3: J25.47 R52.1
CAN-RX: J1.41 J8.4
CAN-RX1: J9.41 J16.4
CAN-RX2: J17.41 J24.4
CAN-RX3: J25.41 J32.4
CAN-TX: J1.43 J8.5
CAN-TX1: J9.43 J16.5
CAN-TX2: J17.43 J24.5
CAN-TX3: J25.43 J32.5
DISP_D/!C: J1.18 J5.30
DISP_D/!C1: J9.18 J13.30
DISP_D/!C2: J17.18 J21.30
DISP_D/!C3: J25.18 J29.30
ENABLE: 3V3_EN.2 D1.C R5.1 U5.5
ENABLE1: 3V3_EN1.2 D9.C R18.1 U3.5
ENABLE2: 3V3_EN2.2 D17.C R31.1 U6.5
ENABLE3: 3V3_EN3.2 D25.C R44.1 U8.5
GND: C1.2 C2.- C3.2 C4.2 C5.2 C6.2 C7.2 C12.2 C13.2 D1.A D2.C D3.P3 D4.P3 D5.P3 D6.P3 D7.P3 D8.P3 H5.1 J1.1 J1.7 J1.33 J1.36 J1.39 J1.45 J1.75 J2.CD1 J2.GND J3.GND J3.GND2 J4.6 J5.1 J5.4 J5.5 J5.6 J5.7 J5.11 J5.12 J5.13 J5.14 J5.15 J5.16 J5.17 J5.18 J5.19 J5.20 J5.21 J5.22 J5.23 J5.24 J5.25 J5.26 J5.27 J5.40 J6.1 J7.3 J7.5 J7.9 J8.2 Q2.2 R1.1 R2.1 R9.1 S1.1 S1.2 S2.1 S2.2 S3.1 S4.1 S6.GND U2.14 U5.4 U5.EP
GND1: C8.2 C9.2 C10.2 C11.- C14.2 C15.2 C16.2 C17.2 C18.2 D9.A D10.C D11.P3 D12.P3 D13.P3 D14.P3 D15.P3 D16.P3 H6.1 J9.1 J9.7 J9.33 J9.36 J9.39 J9.45 J9.75 J10.CD1 J10.GND J11.GND J11.GND2 J12.6 J13.1 J13.4 J13.5 J13.6 J13.7 J13.11 J13.12 J13.13 J13.14 J13.15 J13.16 J13.17 J13.18 J13.19 J13.20 J13.21 J13.22 J13.23 J13.24 J13.25 J13.26 J13.27 J13.40 J14.1 J15.3 J15.5 J15.9 J16.2 Q4.2 R14.1 R16.1 R23.1 S5.1 S5.2 S7.1 S7.2 S8.1 S9.1 S10.GND U1.14 U3.4 U3.EP
GND2: C19.2 C20.2 C21.2 C22.- C23.2 C24.2 C25.2 C26.2 C27.2 D17.A D18.C D19.P3 D20.P3 D21.P3 D22.P3 D23.P3 D24.P3 H11.1 J17.1 J17.7 J17.33 J17.36 J17.39 J17.45 J17.75 J18.CD1 J18.GND J19.GND J19.GND2 J20.6 J21.1 J21.4 J21.5 J21.6 J21.7 J21.11 J21.12 J21.13 J21.14 J21.15 J21.16 J21.17 J21.18 J21.19 J21.20 J21.21 J21.22 J21.23 J21.24 J21.25 J21.26 J21.27 J21.40 J22.1 J23.3 J23.5 J23.9 J24.2 Q6.2 R27.1 R29.1 R36.1 S11.1 S11.2 S12.1 S12.2 S13.1 S14.1 S15.GND U4.14 U6.4 U6.EP
GND3: C28.2 C29.2 C30.2 C31.- C32.2 C33.2 C34.2 C35.2 C36.2 D25.A D26.C D27.P3 D28.P3 D29.P3 D30.P3 D31.P3 D32.P3 H16.1 J25.1 J25.7 J25.33 J25.36 J25.39 J25.45 J25.75 J26.CD1 J26.GND J27.GND J27.GND2 J28.6 J29.1 J29.4 J29.5 J29.6 J29.7 J29.11 J29.12 J29.13 J29.14 J29.15 J29.16 J29.17 J29.18 J29.19 J29.20 J29.21 J29.22 J29.23 J29.24 J29.25 J29.26 J29.27 J29.40 J30.1 J31.3 J31.5 J31.9 J32.2 Q8.2 R40.1 R42.1 R49.1 S16.1 S16.2 S17.1 S17.2 S18.1 S19.1 S20.GND U7.14 U8.4 U8.EP
LED_CLK: D3.P2 J1.40
LED_CLK1: D11.P2 J9.40
LED_CLK2: D19.P2 J17.40
LED_CLK3: D27.P2 J25.40
LED_DATA: D3.P1 J1.42
LED_DATA1: D11.P1 J9.42
LED_DATA2: D19.P1 J17.42
LED_DATA3: D27.P1 J25.42
MISO_ATTINY: J4.1 U2.8
MISO_ATTINY1: J12.1 U1.8
MISO_ATTINY2: J20.1 U4.8
MISO_ATTINY3: J28.1 U7.8
N$1: I2C.3 R7.2
N$2: I2C.1 R8.2
N$3: J5.8 R12.1
N$4: Q1.3 R12.2
N$5: LS1.- Q2.3
N$6: Q2.1 R13.2
N$7: J11.A5 R16.2
N$8: J11.B5 R14.2
N$9: PWR1.1 R15.2
N$10: D10.A R15.1
N$11: D3.P5 D4.P2
N$12: MEAS1.1 MEAS1.3 U3.1
N$13: D11.P5 D12.P2
N$14: D3.P6 D4.P1
N$15: D11.P6 D12.P1
N$16: D12.P5 D13.P2
N$17: D12.P6 D13.P1
N$18: D13.P5 D14.P2
N$19: J3.A5 R2.2
N$20: J3.B5 R1.2
N$21: PWR.1 R11.2
N$22: D2.A R11.1
N$23: MEAS.1 MEAS.3 U5.1
N$24: D4.P5 D5.P2
N$25: D4.P6 D5.P1
N$26: D5.P5 D6.P2
N$27: D5.P6 D6.P1
N$28: D6.P5 D7.P2
N$29: D6.P6 D7.P1
N$30: D7.P5 D8.P2
N$31: D7.P6 D8.P1
N$32: D13.P6 D14.P1
N$33: D14.P5 D15.P2
N$34: D14.P6 D15.P1
N$35: D15.P5 D16.P2
N$36: D15.P6 D16.P1
N$37: I2C1.3 R21.2
N$38: I2C1.1 R22.2
N$39: J13.8 R25.1
N$40: Q3.3 R25.2
N$41: LS2.- Q4.3
N$42: Q4.1 R26.2
N$43: J19.A5 R29.2
N$44: J19.B5 R27.2
N$45: PWR2.1 R28.2
N$46: D18.A R28.1
N$47: MEAS2.1 MEAS2.3 U6.1
N$48: D19.P5 D20.P2
N$49: D19.P6 D20.P1
N$50: D20.P5 D21.P2
N$51: D20.P6 D21.P1
N$52: D21.P5 D22.P2
N$53: D21.P6 D22.P1
N$54: D22.P5 D23.P2
N$55: D22.P6 D23.P1
N$56: D23.P5 D24.P2
N$57: D23.P6 D24.P1
N$58: I2C2.3 R34.2
N$59: I2C2.1 R35.2
N$60: J21.8 R38.1
N$61: Q5.3 R38.2
N$62: LS3.- Q6.3
N$63: Q6.1 R39.2
N$64: J27.A5 R42.2
N$65: J27.B5 R40.2
N$66: PWR3.1 R41.2
N$67: D26.A R41.1
N$68: MEAS3.1 MEAS3.3 U8.1
N$69: D27.P5 D28.P2
N$70: D27.P6 D28.P1
N$71: D28.P5 D29.P2
N$72: D28.P6 D29.P1
N$73: D29.P5 D30.P2
N$74: D29.P6 D30.P1
N$75: D30.P5 D31.P2
N$76: D30.P6 D31.P1
N$77: D31.P5 D32.P2
N$78: D31.P6 D32.P1
N$79: I2C3.3 R47.2
N$80: I2C3.1 R48.2
N$81: J29.8 R51.1
N$82: Q7.3 R51.2
N$83: LS4.- Q8.3
N$84: Q8.1 R52.2
RX1: J1.19 J8.6
RX2: J9.19 J16.6
RX3: J17.19 J24.6
RX4: J25.19 J32.6
SCL: J1.14 J4.3 J6.4 R7.1 U2.9
SCL1: J9.14 J12.3 J14.4 R21.1 U1.9
SCL2: J17.14 J20.3 J22.4 R34.1 U4.9
SCL3: J25.14 J28.3 J30.4 R47.1 U7.9
SDA: J1.12 J4.4 J6.3 R8.1 U2.7
SDA1: J9.12 J12.4 J14.3 R22.1 U1.7
SDA2: J17.12 J20.4 J22.3 R35.1 U4.7
SDA3: J25.12 J28.4 J30.3 R48.1 U7.7
SPI_CIPO: J1.61 J2.DO J5.28
SPI_CIPO1: J9.61 J10.DO J13.28
SPI_CIPO2: J17.61 J18.DO J21.28
SPI_CIPO3: J25.61 J26.DO J29.28
SPI_COPI: J1.59 J2.DI J5.39
SPI_COPI1: J9.59 J10.DI J13.39
SPI_COPI2: J17.59 J18.DI J21.39
SPI_COPI3: J25.59 J26.DI J29.39
SPI_SCK: J1.57 J2.SCLK J5.33
SPI_SCK1: J9.57 J10.SCLK J13.33
SPI_SCK2: J17.57 J18.SCLK J21.33
SPI_SCK3: J25.57 J26.SCLK J29.33
SWDCK: J1.21 J7.4 TP1.P$1
SWDCK1: J9.21 J15.4 TP2.P$1
SWDCK2: J17.21 J23.4 TP3.P$1
SWDCK3: J25.21 J31.4 TP4.P$1
SWDIO: J1.23 J7.2
SWDIO1: J9.23 J15.2
SWDIO2: J17.23 J23.2
SWDIO3: J25.23 J31.2
TX1: J1.17 J8.7
TX2: J9.17 J16.7
TX3: J17.17 J24.7
TX4: J25.17 J32.7
USB_D+: J1.3 J3.A6 J3.B6
USB_D+1: J9.3 J11.A6 J11.B6
USB_D+2: J17.3 J19.A6 J19.B6
USB_D+3: J25.3 J27.A6 J27.B6
USB_D-: J1.5 J3.A7 J3.B7
USB_D-1: J9.5 J11.A7 J11.B7
USB_D-2: J17.5 J19.A7 J19.B7
USB_D-3: J25.5 J27.A7 J27.B7
V_USB: BYP.1 F2.1 J3.VBUS1 J3.VBUS2 J8.1
V_USB1: BYP1.1 F1.1 J11.VBUS1 J11.VBUS2 J16.1
V_USB2: BYP2.1 F3.1 J19.VBUS1 J19.VBUS2 J24.1
V_USB3: BYP3.1 F4.1 J27.VBUS1 J27.VBUS2 J32.1
VIN: BYP.2 C1.1 C2.+ C13.1 F2.2 J1.9 R5.2 U5.8
VIN1: BYP1.2 C8.1 C10.1 C11.+ F1.2 J9.9 R18.2 U3.8
VIN2: BYP2.2 C19.1 C21.1 C22.+ F3.2 J17.9 R31.2 U6.8
VIN3: BYP3.2 C28.1 C30.1 C31.+ F4.2 J25.9 R44.2 U8.8

## Tracks (layer width: path | path; a pad name or v marks a point on that pad's centre or on a via)
3.3V  (via drill 0.38)
  Top 0.203: R3.2 27.98,13.25 28.19,13.46 28.19,14.73 28.41,14.95 C12.1
  Top 0.406: U2.1 29.08,17.02 | 29.08,17.02 29.08,18.67 J4.2 | C12.1 29.08,17.02
  Top 0.61: D3.P4 14.1,44.79 | 14.1,75.27 14.1,82.3 13.5,82.89 D8.P4 | 14.1,44.79 v14.1,49.91 14.1,52.41 | 14.1,52.41 v14.1,59.05 | v14.1,59.05 14.1,60.03 D5.P4 | v14.1,59.05 14.1,67.65 | 14.1,67.65 14.1,75.27 | D7.P4 14.1,75.27 | D6.P4 14.1,67.65 | D4.P4 14.1,52.41 | v40.58,70.61 37.03,70.61 35.69,69.27 v35.69,66.93 | v43.56,32.89 43.56,30.35 | 14.1,44.79 14.1,35.43 15.75,33.78 v21.59,33.78 26.29,33.78 v27.05,33.02 27.18,32.89 35.69,32.89 37.46,31.11 37.46,26.29 38.48,25.27 41.78,25.27 | v48.01,32.77 48.01,31.5 46.86,30.35 43.56,30.35 | MEAS.4 41.78,25.27 | 43.56,30.35 43.56,25.78 43.05,25.27 41.78,25.27
  Bottom 0.203: 44.57,70.61 45.08,70.1 J5.38 45.08,65.02 44.32,64.26 R10.2 | J5.29 v40.58,70.61 | J5.31 41.58,70.61 | J1.2 26.43,33.38 26.8,33.02 v27.05,33.02 | J1.74 44.43,33.51 43.81,32.89 v43.56,32.89 | I2C.2 53.47,38.35 52.96,37.85 48.01,37.85
  Bottom 0.305: MEAS.2 MEAS.4
  Bottom 0.406: J4.2 28.32,17.91 22.48,17.91 21.59,18.8 21.59,26.04 | 21.59,26.04 v21.59,33.78 | J7.1 9.52,26.92 10.41,26.04 21.59,26.04 | Q1.2 29.15,59.05
  Bottom 0.61: MEAS.4 42.2,23.2 C5.1 C4.1 C3.1 53.59,23.2 | v35.69,66.93 35.73,66.93 C7.1 R4.2 35.73,59.98 34.8,59.05 29.15,59.05 v14.1,59.05 | v40.58,70.61 41.58,70.61 44.57,70.61 | J2.VCC 59.49,62.18 59.86,61.81 59.86,55.79 56.64,52.58 55.12,52.58 | v48.01,32.77 48.01,37.85 48.01,48.01 50,50 R6.2 C6.1 55.12,52.58 | J6.2 56.01,48.38 55.12,49.28 55.12,52.58 | 53.59,23.2 55.97,23.2 59.94,27.18 J8.3 | PWR.2 53.59,23.2 | LS1.+ 14.16,49.97 v14.1,49.91
3.3V1  (via drill 0.38)
  Top 0.203: R17.2 85.64,13.25 85.85,13.46 85.85,14.73 86.07,14.95 C9.1
  Top 0.406: U1.1 86.74,17.02 | 86.74,17.02 86.74,18.67 J12.2 | C9.1 86.74,17.02
  Top 0.61: D11.P4 71.76,44.79 | 71.76,75.27 71.76,82.3 71.16,82.89 D16.P4 | 71.76,44.79 v71.76,49.91 71.76,52.41 | 71.76,52.41 v71.76,59.05 | v71.76,59.05 71.76,60.03 D13.P4 | v71.76,59.05 71.76,67.65 | 71.76,67.65 71.76,75.27 | D15.P4 71.76,75.27 | D14.P4 71.76,67.65 | D12.P4 71.76,52.41 | v98.24,70.61 94.69,70.61 93.34,69.27 v93.34,66.93 | v101.22,32.89 101.22,30.35 | 71.76,44.79 71.76,35.43 73.41,33.78 v79.25,33.78 83.95,33.78 v84.71,33.02 84.84,32.89 93.34,32.89 95.12,31.11 95.12,26.29 96.14,25.27 99.44,25.27 | v105.66,32.77 105.66,31.5 104.52,30.35 101.22,30.35 | MEAS1.4 99.44,25.27 | 101.22,30.35 101.22,25.78 100.71,25.27 99.44,25.27
  Bottom 0.203: 102.23,70.61 102.74,70.1 J13.38 102.74,65.02 101.98,64.26 R24.2 | J13.29 v98.24,70.61 | J13.31 99.24,70.61 | J9.2 84.09,33.38 84.45,33.02 v84.71,33.02 | J9.74 102.09,33.51 101.47,32.89 v101.22,32.89 | I2C1.2 111.12,38.35 110.62,37.85 105.66,37.85
  Bottom 0.305: MEAS1.2 MEAS1.4
  Bottom 0.406: J12.2 85.98,17.91 80.14,17.91 79.25,18.8 79.25,26.04 | 79.25,26.04 v79.25,33.78 | J15.1 67.18,26.92 68.07,26.04 79.25,26.04 | Q3.2 86.81,59.05
  Bottom 0.61: MEAS1.4 99.86,23.2 C16.1 C15.1 C14.1 111.25,23.2 | v93.34,66.93 93.38,66.93 C18.1 R19.2 93.38,59.98 92.46,59.05 86.81,59.05 v71.76,59.05 | v98.24,70.61 99.24,70.61 102.23,70.61 | J10.VCC 117.15,62.18 117.51,61.81 117.51,55.79 114.3,52.58 112.78,52.58 | v105.66,32.77 105.66,37.85 105.66,48.01 107.66,50 R20.2 C17.1 112.78,52.58 | J14.2 113.67,48.38 112.78,49.28 112.78,52.58 | 111.25,23.2 113.63,23.2 117.6,27.18 J16.3 | PWR1.2 111.25,23.2 | LS2.+ 71.82,49.97 v71.76,49.91
3.3V2  (via drill 0.38)
  Top 0.203: R30.2 27.98,98.84 28.19,99.06 28.19,100.33 28.41,100.55 C20.1
  Top 0.406: U4.1 29.08,102.62 | 29.08,102.62 29.08,104.27 J20.2 | C20.1 29.08,102.62
  Top 0.61: D19.P4 14.1,130.39 | 14.1,160.87 14.1,167.89 13.5,168.49 D24.P4 | 14.1,130.39 v14.1,135.51 14.1,138.01 | 14.1,138.01 v14.1,144.65 | v14.1,144.65 14.1,145.63 D21.P4 | v14.1,144.65 14.1,153.25 | 14.1,153.25 14.1,160.87 | D23.P4 14.1,160.87 | D22.P4 14.1,153.25 | D20.P4 14.1,138.01 | v40.58,156.21 37.03,156.21 35.69,154.87 v35.69,152.53 | v43.56,118.49 43.56,115.95 | 14.1,130.39 14.1,121.03 15.75,119.38 v21.59,119.38 26.29,119.38 v27.05,118.62 27.18,118.49 35.69,118.49 37.46,116.71 37.46,111.89 38.48,110.87 41.78,110.87 | v48.01,118.36 48.01,117.09 46.86,115.95 43.56,115.95 | MEAS2.4 41.78,110.87 | 43.56,115.95 43.56,111.38 43.05,110.87 41.78,110.87
  Bottom 0.203: 44.57,156.21 45.08,155.7 J21.38 45.08,150.62 44.32,149.86 R37.2 | J21.29 v40.58,156.21 | J21.31 41.58,156.21 | J17.2 26.43,118.98 26.8,118.62 v27.05,118.62 | J17.74 44.43,119.11 43.81,118.49 v43.56,118.49 | I2C2.2 53.47,123.95 52.96,123.44 48.01,123.44
  Bottom 0.305: MEAS2.2 MEAS2.4
  Bottom 0.406: J20.2 28.32,103.5 22.48,103.5 21.59,104.39 21.59,111.63 | 21.59,111.63 v21.59,119.38 | J23.1 9.52,112.52 10.41,111.63 21.59,111.63 | Q5.2 29.15,144.65
  Bottom 0.61: MEAS2.4 42.2,108.8 C25.1 C24.1 C23.1 53.59,108.8 | v35.69,152.53 35.73,152.53 C27.1 R32.2 35.73,145.58 34.8,144.65 29.15,144.65 v14.1,144.65 | v40.58,156.21 41.58,156.21 44.57,156.21 | J18.VCC 59.49,147.78 59.86,147.41 59.86,141.39 56.64,138.18 55.12,138.18 | v48.01,118.36 48.01,123.44 48.01,133.6 50,135.6 R33.2 C26.1 55.12,138.18 | J22.2 56.01,133.98 55.12,134.87 55.12,138.18 | 53.59,108.8 55.97,108.8 59.94,112.78 J24.3 | PWR2.2 53.59,108.8 | LS3.+ 14.16,135.57 v14.1,135.51
3.3V3  (via drill 0.38)
  Top 0.203: R43.2 85.64,98.84 85.85,99.06 85.85,100.33 86.07,100.55 C29.1
  Top 0.406: U7.1 86.74,102.62 | 86.74,102.62 86.74,104.27 J28.2 | C29.1 86.74,102.62
  Top 0.61: D27.P4 71.76,130.39 | 71.76,160.87 71.76,167.89 71.16,168.49 D32.P4 | 71.76,130.39 v71.76,135.51 71.76,138.01 | 71.76,138.01 v71.76,144.65 | v71.76,144.65 71.76,145.63 D29.P4 | v71.76,144.65 71.76,153.25 | 71.76,153.25 71.76,160.87 | D31.P4 71.76,160.87 | D30.P4 71.76,153.25 | D28.P4 71.76,138.01 | v98.24,156.21 94.69,156.21 93.34,154.87 v93.34,152.53 | v101.22,118.49 101.22,115.95 | 71.76,130.39 71.76,121.03 73.41,119.38 v79.25,119.38 83.95,119.38 v84.71,118.62 84.84,118.49 93.34,118.49 95.12,116.71 95.12,111.89 96.14,110.87 99.44,110.87 | v105.66,118.36 105.66,117.09 104.52,115.95 101.22,115.95 | MEAS3.4 99.44,110.87 | 101.22,115.95 101.22,111.38 100.71,110.87 99.44,110.87
  Bottom 0.203: 102.23,156.21 102.74,155.7 J29.38 102.74,150.62 101.98,149.86 R50.2 | J29.29 v98.24,156.21 | J29.31 99.24,156.21 | J25.2 84.09,118.98 84.45,118.62 v84.71,118.62 | J25.74 102.09,119.11 101.47,118.49 v101.22,118.49 | I2C3.2 111.12,123.95 110.62,123.44 105.66,123.44
  Bottom 0.305: MEAS3.2 MEAS3.4
  Bottom 0.406: J28.2 85.98,103.5 80.14,103.5 79.25,104.39 79.25,111.63 | 79.25,111.63 v79.25,119.38 | J31.1 67.18,112.52 68.07,111.63 79.25,111.63 | Q7.2 86.81,144.65
  Bottom 0.61: MEAS3.4 99.86,108.8 C34.1 C33.1 C32.1 111.25,108.8 | v93.34,152.53 93.38,152.53 C36.1 R45.2 93.38,145.58 92.46,144.65 86.81,144.65 v71.76,144.65 | v98.24,156.21 99.24,156.21 102.23,156.21 | J26.VCC 117.15,147.78 117.51,147.41 117.51,141.39 114.3,138.18 112.78,138.18 | v105.66,118.36 105.66,123.44 105.66,133.6 107.66,135.6 R46.2 C35.1 112.78,138.18 | J30.2 113.67,133.98 112.78,134.87 112.78,138.18 | 111.25,108.8 113.63,108.8 117.6,112.78 J32.3 | PWR3.2 111.25,108.8 | LS4.+ 71.82,135.57 v71.76,135.51
3.3V_EN  (via drill 0.38)
  Top 0.203: v26.54,36.2 26.54,35.18 27.69,34.04 38.86,34.04 40.13,35.31 v40.13,36.32 | v56.39,21.46 56.39,31.88 51.94,36.32 v46.35,36.32
  Bottom 0.203: J1.4 26.93,35.8 v26.54,36.2 | v56.39,21.46 56.39,21.44 55.9,20.95 3V3_EN.1 | v40.13,36.32 v46.35,36.32
3.3V_EN1  (via drill 0.38)
  Top 0.203: v84.2,36.2 84.2,35.18 85.34,34.04 96.52,34.04 97.79,35.31 v97.79,36.32 | v114.05,21.46 114.05,31.88 109.6,36.32 v104.01,36.32
  Bottom 0.203: J9.4 84.59,35.8 v84.2,36.2 | v114.05,21.46 114.05,21.44 113.56,20.95 3V3_EN1.1 | v97.79,36.32 v104.01,36.32
3.3V_EN2  (via drill 0.38)
  Top 0.203: v26.54,121.79 26.54,120.78 27.69,119.63 38.86,119.63 40.13,120.9 v40.13,121.92 | v56.39,107.06 56.39,117.47 51.94,121.92 v46.35,121.92
  Bottom 0.203: J17.4 26.93,121.4 v26.54,121.79 | v56.39,107.06 56.39,107.04 55.9,106.55 3V3_EN2.1 | v40.13,121.92 v46.35,121.92
3.3V_EN3  (via drill 0.38)
  Top 0.203: v84.2,121.79 84.2,120.78 85.34,119.63 96.52,119.63 97.79,120.9 v97.79,121.92 | v114.05,107.06 114.05,117.47 109.6,121.92 v104.01,121.92
  Bottom 0.203: J25.4 84.59,121.4 v84.2,121.79 | v114.05,107.06 114.05,107.04 113.56,106.55 3V3_EN3.1 | v97.79,121.92 v104.01,121.92
!BOOT  (via drill 0.38)
  Top 0.203: v32.51,35.18 37.59,35.18 39.12,36.7 39.12,41.53 39.62,42.04 54.48,42.04 56.39,43.94 56.39,71.25 v56.9,71.75
  Bottom 0.203: S2.3 v56.9,71.75 S2.4 | v32.51,35.18 32.38,35.05 32.38,33.48 28.68,29.78 J1.11
!BOOT1  (via drill 0.38)
  Top 0.203: v90.17,35.18 95.25,35.18 96.77,36.7 96.77,41.53 97.28,42.04 112.14,42.04 114.05,43.94 114.05,71.25 v114.55,71.75
  Bottom 0.203: S7.3 v114.55,71.75 S7.4 | v90.17,35.18 90.04,35.05 90.04,33.48 86.34,29.78 J9.11
!BOOT2  (via drill 0.38)
  Top 0.203: v32.51,120.78 37.59,120.78 39.12,122.3 39.12,127.13 39.62,127.63 54.48,127.63 56.39,129.54 56.39,156.84 v56.9,157.35
  Bottom 0.203: S12.3 v56.9,157.35 S12.4 | v32.51,120.78 32.38,120.65 32.38,119.08 28.68,115.38 J17.11
!BOOT3  (via drill 0.38)
  Top 0.203: v90.17,120.78 95.25,120.78 96.77,122.3 96.77,127.13 97.28,127.63 112.14,127.63 114.05,129.54 114.05,156.84 v114.55,157.35
  Bottom 0.203: S17.3 v114.55,157.35 S17.4 | v90.17,120.78 90.04,120.65 90.04,119.08 86.34,115.38 J25.11
!DISP_BL  (via drill 0.38)
  Top 0.203: v31.12,60.33 35.56,60.33 38.35,57.53 38.35,47.62 37.72,46.99 34.92,46.99 33.53,45.59 v33.53,39.12
  Bottom 0.203: v33.53,39.12 33.93,38.71 J1.32 | v31.12,60.33 31.05,60.39 Q1.1 31.15,61.51 R9.2
!DISP_BL1  (via drill 0.38)
  Top 0.203: v88.77,60.33 93.22,60.33 96.01,57.53 96.01,47.62 95.38,46.99 92.58,46.99 91.19,45.59 v91.19,39.12
  Bottom 0.203: v91.19,39.12 91.59,38.71 J9.32 | v88.77,60.33 88.71,60.39 Q3.1 88.81,61.51 R23.2
!DISP_BL2  (via drill 0.38)
  Top 0.203: v31.12,145.92 35.56,145.92 38.35,143.13 38.35,133.22 37.72,132.59 34.92,132.59 33.53,131.19 v33.53,124.71
  Bottom 0.203: v33.53,124.71 33.93,124.31 J17.32 | v31.12,145.92 31.05,145.99 Q5.1 31.15,147.1 R36.2
!DISP_BL3  (via drill 0.38)
  Top 0.203: v88.77,145.92 93.22,145.92 96.01,143.13 96.01,133.22 95.38,132.59 92.58,132.59 91.19,131.19 v91.19,124.71
  Bottom 0.203: v91.19,124.71 91.59,124.31 J25.32 | v88.77,145.92 88.71,145.99 Q7.1 88.81,147.1 R49.2
!DISP_CS  (via drill 0.38)
  Top 0.203: v41.91,63.5 41.91,62.1 41.15,61.34 v38.61,61.34
  Bottom 0.203: J1.10 28.43,42.4 31.5,45.47 38.48,45.47 39.37,46.36 39.37,60.58 v38.61,61.34 R4.1 | v41.91,63.5 42.08,63.67 J5.32
!DISP_CS1  (via drill 0.38)
  Top 0.203: v99.57,63.5 99.57,62.1 98.81,61.34 v96.27,61.34
  Bottom 0.203: J9.10 86.09,42.4 89.15,45.47 96.14,45.47 97.03,46.36 97.03,60.58 v96.27,61.34 R19.1 | v99.57,63.5 99.74,63.67 J13.32
!DISP_CS2  (via drill 0.38)
  Top 0.203: v41.91,149.1 41.91,147.7 41.15,146.94 v38.61,146.94
  Bottom 0.203: J17.10 28.43,128 31.5,131.06 38.48,131.06 39.37,131.95 39.37,146.18 v38.61,146.94 R32.1 | v41.91,149.1 42.08,149.27 J21.32
!DISP_CS3  (via drill 0.38)
  Top 0.203: v99.57,149.1 99.57,147.7 98.81,146.94 v96.27,146.94
  Bottom 0.203: J25.10 86.09,128 89.15,131.06 96.14,131.06 97.03,131.95 97.03,146.18 v96.27,146.94 R45.1 | v99.57,149.1 99.74,149.27 J29.32
!DISP_RST  (via drill 0.38)
  Top 0.203: v44.2,58.8 43.18,59.82 41.15,59.82 39.37,58.04 39.37,47.24 38.35,46.23 36.2,46.23 35.43,45.47 35.43,39.88 36.07,39.24 v37.21,39.24
  Bottom 0.203: J5.34 43.08,61.82 43.52,61.38 R10.1 44.32,58.93 v44.2,58.8 | v37.21,39.24 38.1,38.35 38.1,36.96 36.93,35.79 J1.44
!DISP_RST1  (via drill 0.38)
  Top 0.203: v101.85,58.8 100.84,59.82 98.81,59.82 97.03,58.04 97.03,47.24 96.01,46.23 93.85,46.23 93.09,45.47 93.09,39.88 93.73,39.24 v94.87,39.24
  Bottom 0.203: J13.34 100.74,61.82 101.18,61.38 R24.1 101.98,58.93 v101.85,58.8 | v94.87,39.24 95.76,38.35 95.76,36.96 94.59,35.79 J9.44
!DISP_RST2  (via drill 0.38)
  Top 0.203: v44.2,144.4 43.18,145.41 41.15,145.41 39.37,143.64 39.37,132.84 38.35,131.83 36.2,131.83 35.43,131.06 35.43,125.48 36.07,124.84 v37.21,124.84
  Bottom 0.203: J21.34 43.08,147.42 43.52,146.98 R37.1 44.32,144.53 v44.2,144.4 | v37.21,124.84 38.1,123.95 38.1,122.55 36.93,121.39 J17.44
!DISP_RST3  (via drill 0.38)
  Top 0.203: v101.85,144.4 100.84,145.41 98.81,145.41 97.03,143.64 97.03,132.84 96.01,131.83 93.85,131.83 93.09,131.06 93.09,125.48 93.73,124.84 v94.87,124.84